# Altium PCB PCB1.PcbDoc
Units mil, origin at the board's own origin, x right, y up, seen from the top; angles counter-clockwise.
Board outline 2240.03 x 2530.03 mil, 2 copper layers (Top Layer, Bottom Layer); 11 components, 12 nets, 78 pads, 0 vias.
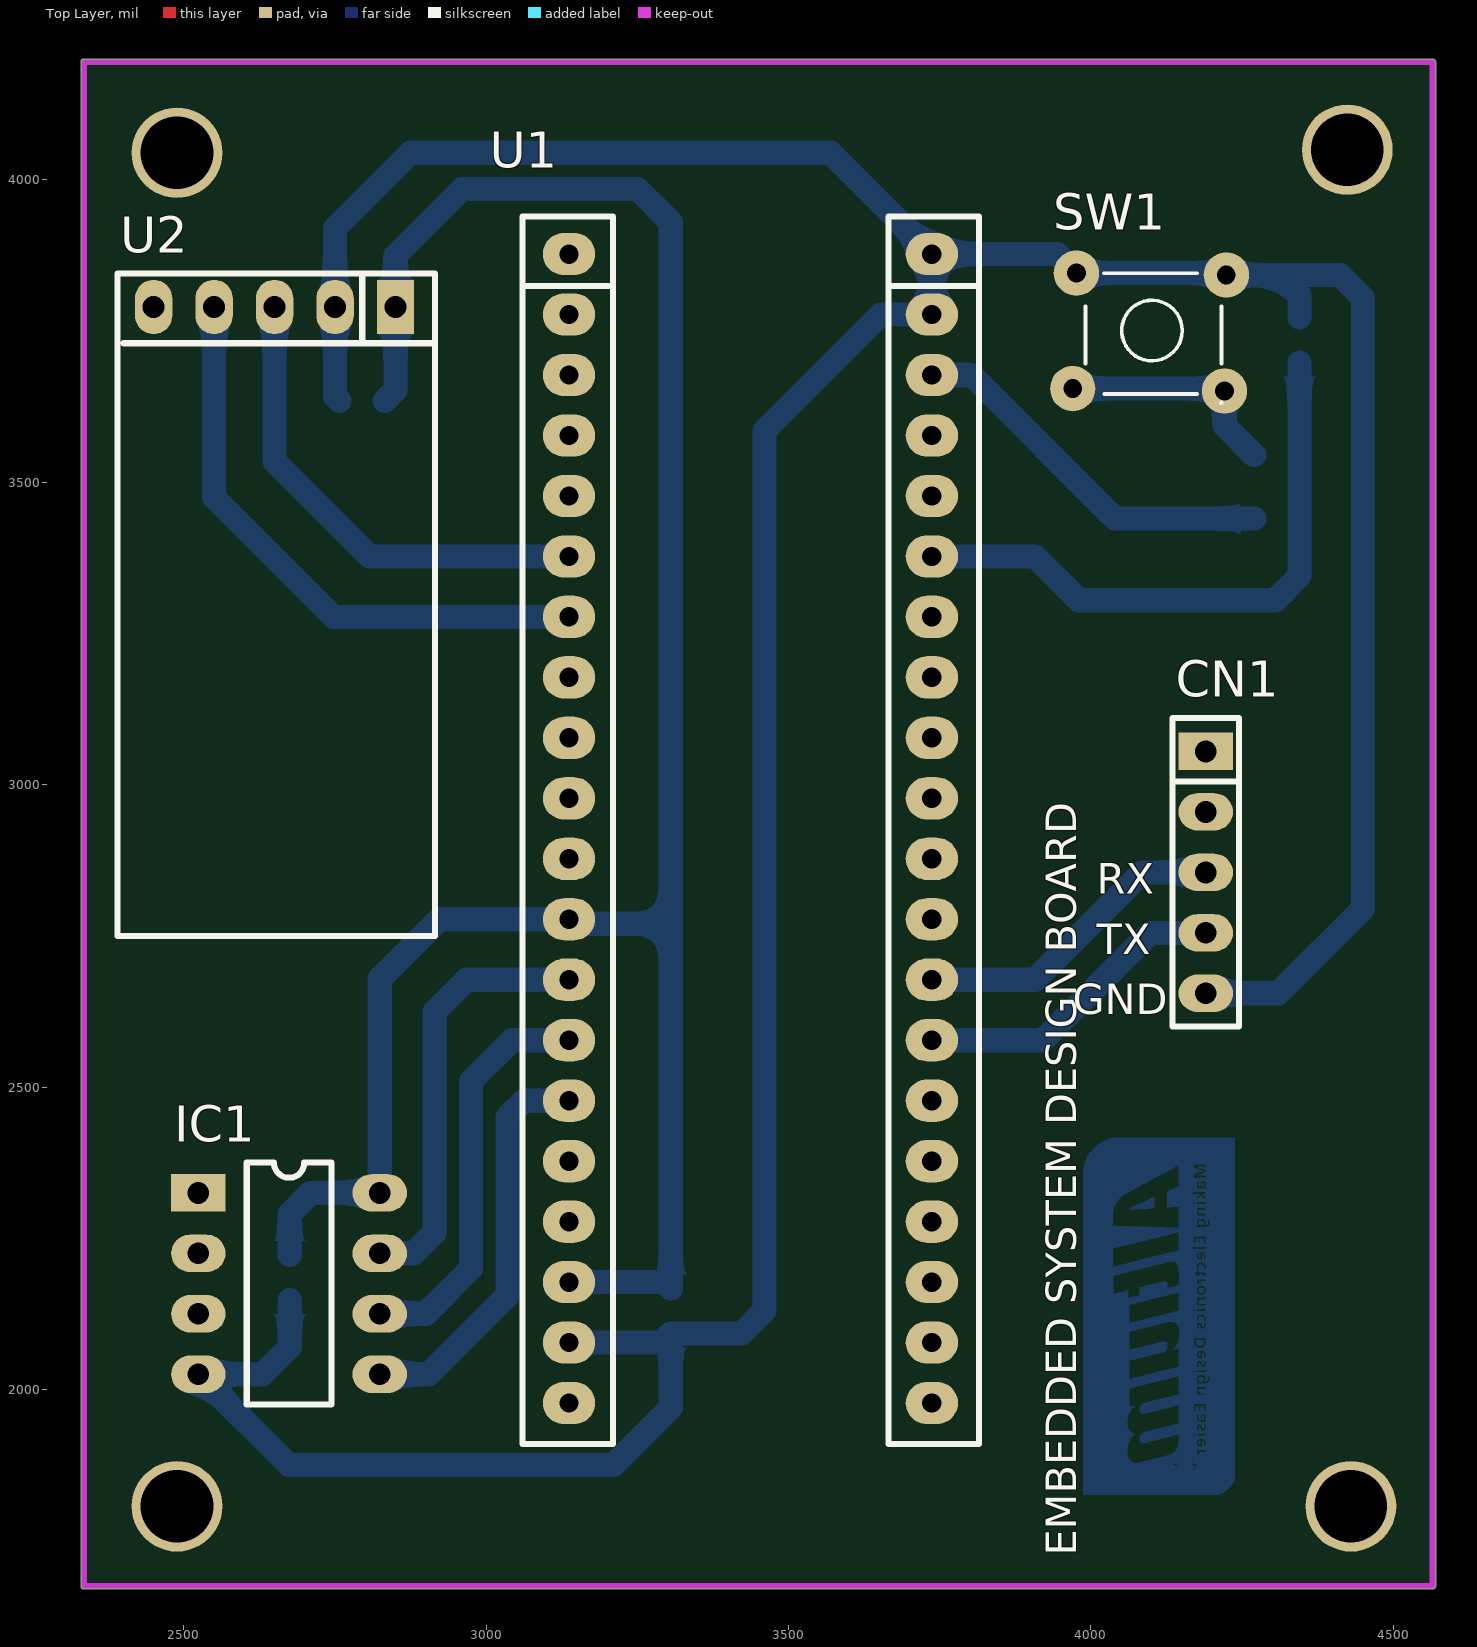
[diagram p0: Top Layer view]
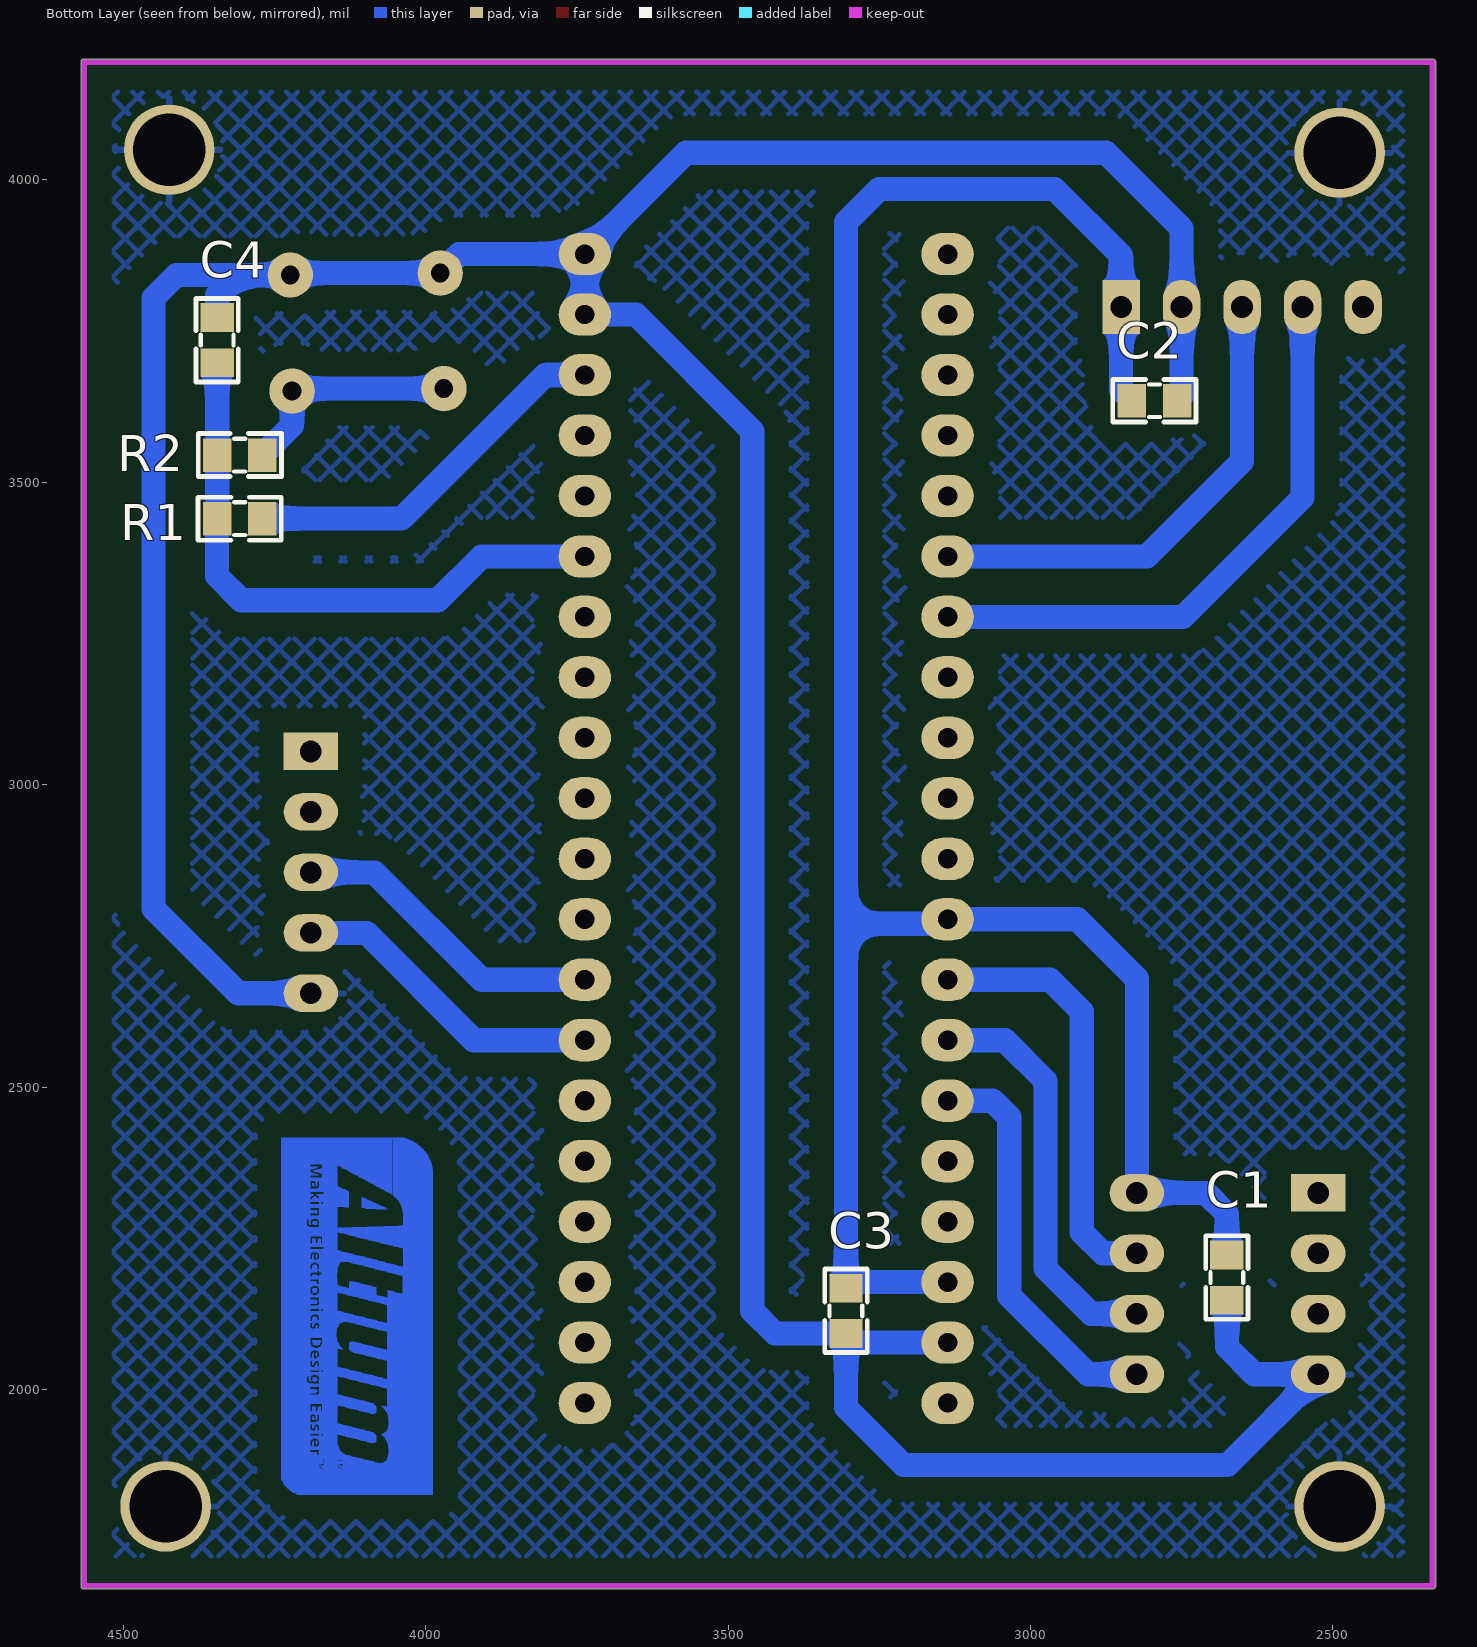
[diagram p1: Bottom Layer view, seen from below]
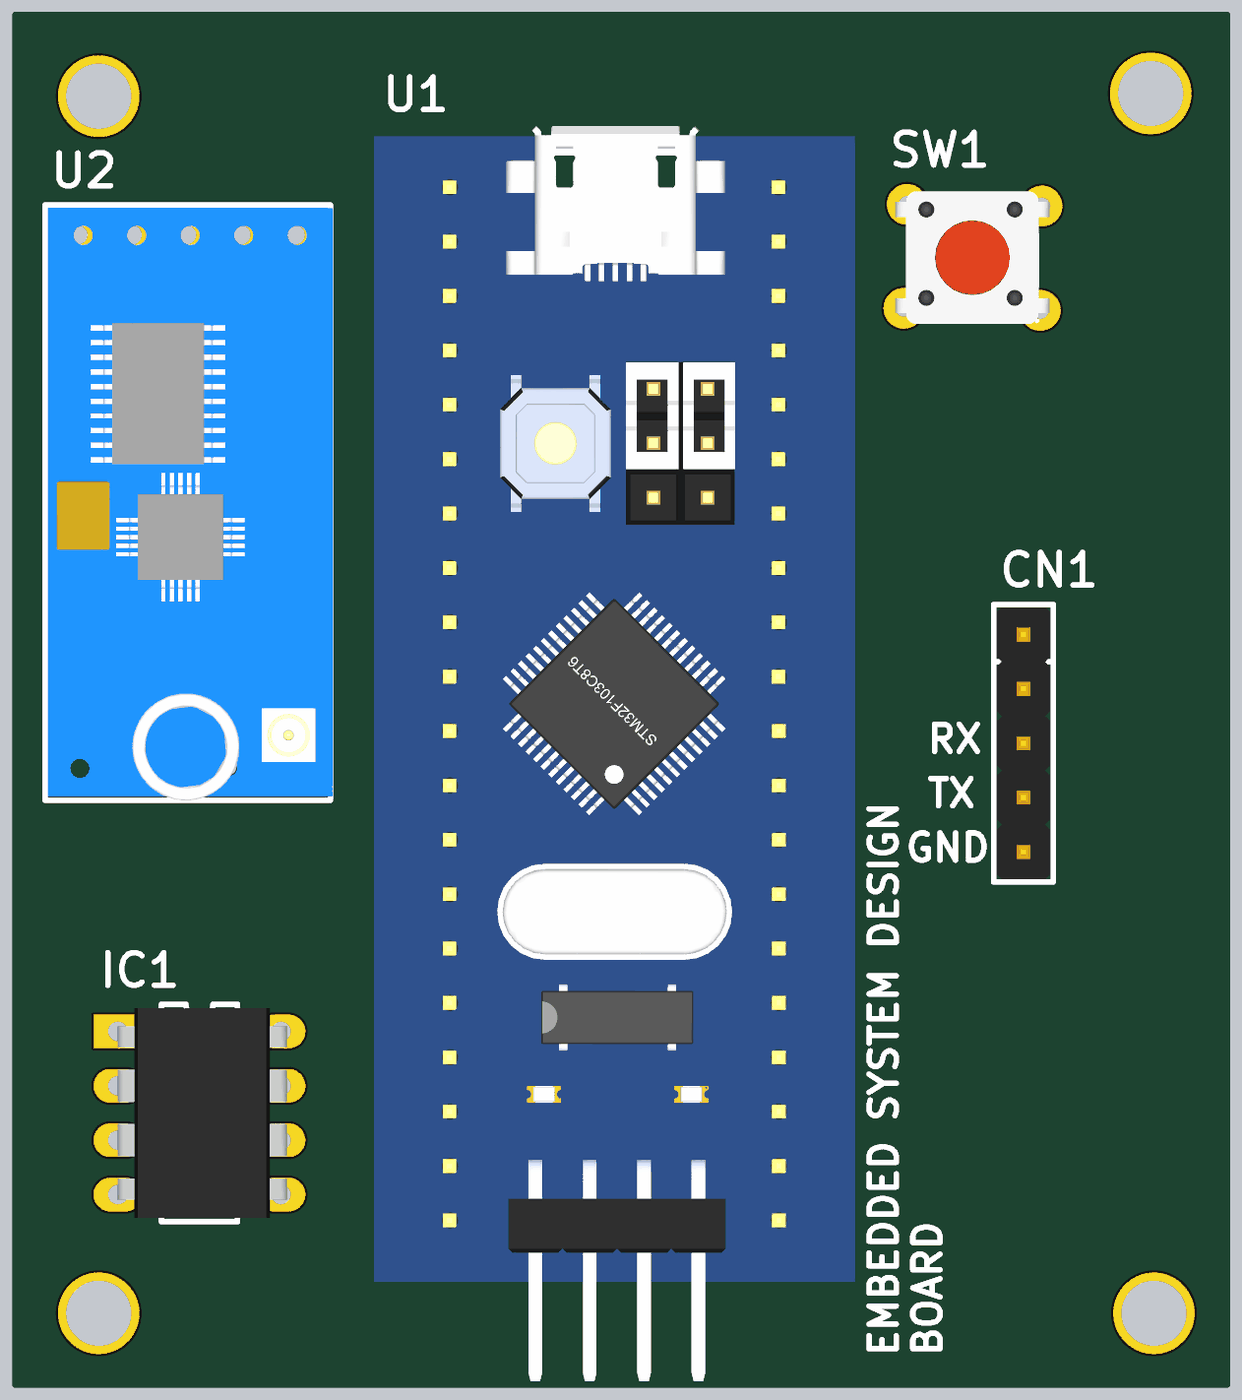
[diagram p2: 3D render of the assembled board from above, using the file's embedded part models]
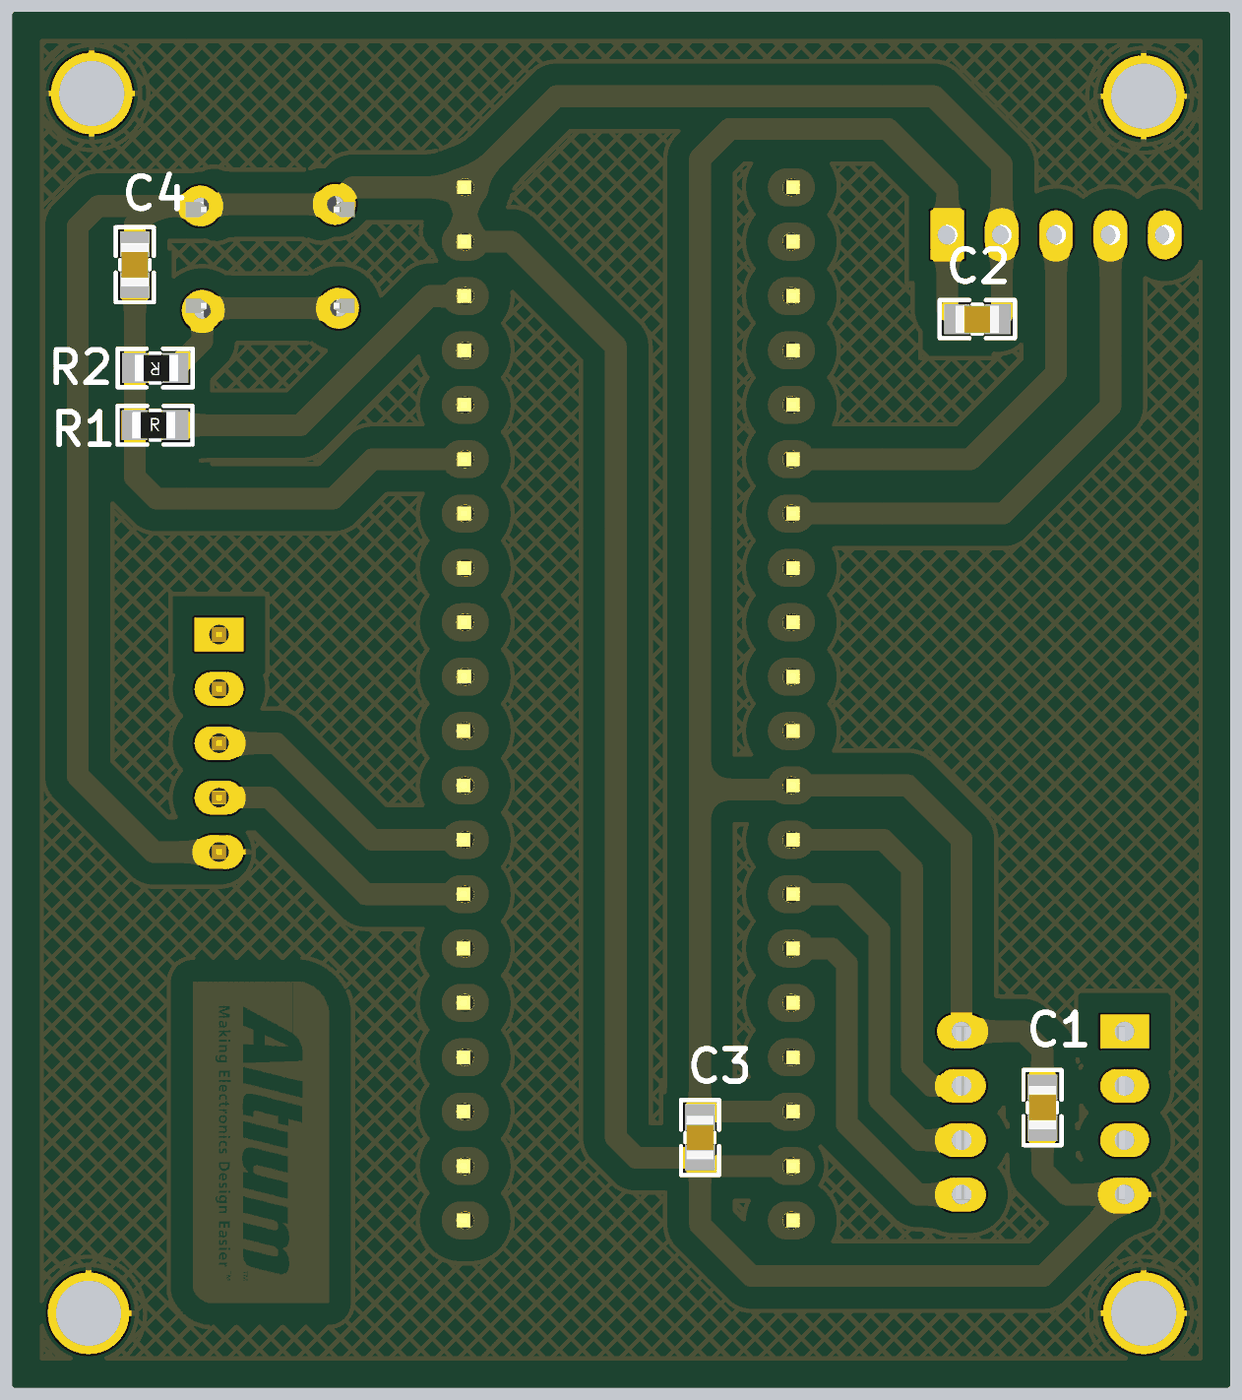
[diagram p3: 3D render of the assembled board from below, using the file's embedded part models]

## Layer stack, top to bottom
Top Solder: solder mask 0.4, Solder Resist, Dk 3.5
Top Layer: signal copper 1.4
Dielectric 1: dielectric 12.6, FR-4, Dk 4.8
Bottom Layer: signal copper 1.4
Bottom Solder: solder mask 0.4, Solder Resist, Dk 3.5

## Board outline
2329.99,1675 2329.98,4195 cw(c2335,4195) 2335,4200.02 4565,4200.02 cw(c4565,4195) 4570.02,4195 4570.02,1675 cw(c4565,1675) 4565,1669.98 2335,1669.98 cw(c2335,1675)

## Design rules (kind name [scope] priority, off if disabled: settings)
Clearance [All] p1: gap=40 ignorepadtopadclearanceinfootprint=FALSE
PolygonConnect [All] p1: connectstyle=Relief reliefconductorwidth=10 reliefentries=4 polygonreliefangle="90 Angle" airgapwidth=10
RoutingVias [All] p1: holewidth=28 width=50 viastyle="Through Hole" minholewidth=28 minwidth=50 maxholewidth=28 maxwidth=50
SolderMaskExpansion [All] p1: expansion=4
Width [All] p1: maxlimit=50 minlimit=30 preferedwidth=40
30 further rules are at their usual default settings.

## Components (designator, comment, footprint, x,y, rotation, side; value= is the part's Value field where it differs from the comment)
C1 "104" "tu 0805" 2675,2185 r270 bottom
C2 "104" "tu 0805" 2795,3635 r180 bottom
C3 "104" "tu 0805" 3305,2130 r270 bottom
C4 "104" "tu 0805" 4345,3735 r90 bottom
CN1 "Header 5p" "HEADER 5P MALE" 4190,3055 r0 top
IC1 "MH002775" DIP8 2524,2325 r0 top
R1 "10k" "tro smd 0805" 4307.77,3442.39 r180 bottom
R2 "1k" "tro smd 0805" 4307.43,3542.61 r0 bottom
SW1 "Nut Nhan 4 Chan" SW4 3976,3846 r0 top value="Nút Nh?n 4 Chân 6x6x9MM DIP"
U1 "Using STM32F103C8 MCU" "STM32 BluePill" 3141.99,3877.48 r0 top
U2 "HC 12" "HC 12" 2850,3790 r270 top

## Footprints (in the part's own frame and the unit in brackets; to place one, negate y for a bottom-side part, rotate by r counter-clockwise, add the part's x,y. Pads: shape width x height; smd on the part's side, far side on the other; paste and mask are expansions set on the pad)
DIP8 [mil]
  rect 90x62 hole 36: 1(0,0)
  oval 90x62 hole 36: 2(0,-100) 3(0,-200) 4(0,-300) 5(300,-300) 6(300,-200) 7(300,-100) 8(300,0)
  silkscreen extent 80,-350 220,50, body extent -1,-343 311,43, height 179
"HC 12" [mil]
  rect 90x62 hole 36: 1(0,0)
  oval 90x62 hole 36: 2(0,-100) 3(0,-200) 4(0,-300) 5(0,-400)
  silkscreen extent -55,-460 1040,65, body extent -50,-455 1040,69, height 1020
"HEADER 5P MALE" [mil]
  rect 90x62 hole 36: 1(0,0)
  oval 90x62 hole 36: 2(0,-100) 3(0,-200) 4(0,-300) 5(0,-400)
  silkscreen extent -55,-455 55,55, body extent -50,-450 50,50, height 350
"STM32 BluePill" [mil]
  oval 86.61x70 hole 32: 1(-5,0) 2(-5,-100) 3(-5,-200) 4(-5,-300) 5(-5,-400) 6(-5,-500) 7(-5,-600) 8(-5,-700) 9(-5,-800) 10(-5,-900) 11(-5,-1000) 12(-5,-1100) 13(-5,-1200) 14(-5,-1300) 15(-5,-1400) 16(-5,-1500) 17(-5,-1600) 18(-5,-1700) 19(-5,-1800) 20(-5,-1900) 21(595,-1900) 22(595,-1800) 23(595,-1700) 24(595,-1600) 25(595,-1500) 26(595,-1400) 27(595,-1300) 28(595,-1200) 29(595,-1100) 30(595,-1000) 31(595,-900) 32(595,-800) 33(595,-700) 34(595,-600) 35(595,-500) 36(595,-400) 37(595,-300) 38(595,-200) 39(595,-100) 40(595,0)
  body extent -147,-2196 739,113, height 571
SW4 [mil] "SW button 4pin, 250 x250 mil"
  round 75 hole 31: 1(0,0) 2(245,-195) 3(248,-3) 4(-6,-191)
  silkscreen extent 15,-215 240,0, body extent -36,-220 276,24, height 276
"tro smd 0805" [mm]
  rect 1.2x1.4 smd: 1(-0.946,-0.061) 2(0.954,-0.061)
  silkscreen extent -1.75,-0.97 1.75,0.84, body extent -1.56,-0.76 1.44,0.64, height 0.53
"tu 0805" [mm] "Compoment SMD 80x50mil"
  rect 1.2x1.4 smd: 1(-0.946,-0.003) 2(0.954,-0.003)
  silkscreen extent -1.75,-0.89 1.75,0.89, body extent -1.01,-0.64 1.01,0.63, height 0.61

## Part data
C1 C2 C3 C4: library part "Tu 0805 104 50V 10%", "Dán", Chung_Loai=Dán, Don_Vi=Con, Ma_Hang=MH004551, So_Chan=2, Ten_Linh_Kien="T? 0805 104-100nF 10% 50V"
IC1: library part 24Cxx_MH, "Dán", Chung_Loai=Dán, Don_Vi=Con, Ma_Hang=MH002775, Ten_Linh_Kien="AT24C01 DIP8 EEPROM 1KBIT"
R1: library part "Tro 0805 1% 10k", "Dán", Chung_Loai=Dán, Don_Vi=Con, Ma_Hang=MH005473, So_Chan=2, Ten_Linh_Kien="Tr? 0805 1% 10k"
R2: library part "Tro 0805 1% 3.3k", "Dán", Chung_Loai=Dán, Don_Vi=Con, Ma_Hang=MH005472, So_Chan=2, Ten_Linh_Kien="Tr? 0805 1% 3.3k"
SW1: "C?m", Don_Vi=Con, Ma_Hang=MH004077
U1: library part BluePill

## Free pads (board coordinates)
  round 150 hole 120: 2(2488.67,4045) 3(4424.13,4050) 4(4430,1806.68) 6(2488.67,1806.68)

## Nets (pads, with @x,y where several pads share a name; then routed paths per layer and width w, separated by ;. In a path a pad name is that pad's centre, name@x,y a point inside that pad or via, vN(x,y) a via of type N, cw(c..) or ccw(c..) an arc to the next point about the centre after c; other vN are vias at no path point)
3V3: R1.2 U1.38 | length 631.6
  Bottom Layer w40: U1.38 3802.52,3677.48 4040,3440 R1.2
+5: C1.1 C2.1 C3.1 IC1.8 U1.12 U1.18 U2.1 | length 3816.4
  Bottom Layer w40: C1.1 2675.13,2290.13 2710,2325 IC1.8 2824,2679 2922.48,2777.48 U1.12 3144.47,2770 3305.13,2770 ; C2.1 2850,3652.64 U2.1 2850,3875 2960,3985 3250.13,3985 3305.13,3930 3305.13,2770 ; U1.18 3294.89,2177.48 C3.1 3305.13,2770
BUT1: C4.1 R1.1 R2.2 U1.35 | length 1007.4
  Bottom Layer w40: U1.35 3907.52,3377.48 3980,3305 4305,3305 4345,3345 R1.1 4344.87,3440.13 C4.1
GND: C1.2 C2.2 C3.2 C4.2 CN1.5 IC1.4 pad.2 pad.3 pad.4 pad.6 SW1.1 SW1.3 U1.19 U1.39 U1.40 U2.2 | length 7060
  Bottom Layer w40: C1.2 2675.13,2070.13 2630,2025 IC1.4 2674,1875 3210,1875 3305.13,1970.13 C3.2 ; C2.2 2750,3642.29 U2.2 2750,3920 2875,4045 3569.47,4045 U1.40 ; U1.19 3290.18,2077.48 C3.2 ; CN1.5 4310,2655 4450,2795 4450,3805 4412,3843 4311.87,3843 ; C4.2 4344.87,3810 4311.87,3843 ; C3.2 3422.43,2092.43 3460,2130 3460,3585 3652.48,3777.48 U1.39 U1.40 ; U1.40 3944.52,3877.48 SW1.1 4221,3846 SW1.3 4311.87,3843
NetR2_1: R2.1 SW1.2 SW1.4 | length 379
  Bottom Layer w40: SW1.4 4217,3655 SW1.2 4221,3594.2 R2.1
RX: U1.7 U2.4 | length 983.8
  Bottom Layer w40: U2.4 2550,3475 2747.52,3277.48 U1.7
RX2: CN1.3 U1.28 | length 526.5
  Bottom Layer w40: U1.28 3907.48,2677.48 4085,2855 CN1.3
SCL: IC1.6 U1.14 | length 682
  Bottom Layer w40: IC1.6 2900,2125 2975,2200 2975,2510 3042.48,2577.48 U1.14
SDA: IC1.5 U1.15 | length 673.2
  Bottom Layer w40: IC1.5 2905,2025 3035,2155 3035,2450 3062.48,2477.48 U1.15
TX: U1.6 U2.3 | length 807.2
  Bottom Layer w40: U2.3 2650,3535 2807.52,3377.48 U1.6
TX2: CN1.4 U1.27 | length 526.5
  Bottom Layer w40: U1.27 3920.61,2577.48 4098.14,2755 CN1.4
WP: IC1.7 U1.13 | length 714.2
  Bottom Layer w40: IC1.7 2880,2225 2915,2260 2915,2625 2967.48,2677.48 U1.13
pads on no net: CN1.1 CN1.2 IC1.1 IC1.2 IC1.3 U1.1 U1.2 U1.3 U1.4 U1.5 U1.8 U1.9 U1.10 U1.11 U1.16 U1.17 U1.20 U1.21 U1.22 U1.23 U1.24 U1.25 U1.26 U1.29 U1.30 U1.31 U1.32 U1.33 U1.34 U1.36 U1.37 U2.5
copper on no net: | length 113193
  Bottom Layer w1: 3988,1826 3988,2363 ; 3989,1826 3989,2369 ; 3990,1826 3990,2372 ; 3991,1826 3991,2375 ; 3992,1826 3992,2378 ; 3993,1826 3993,2380 ; 3994,1826 3994,2382 ; 3995,1826 3995,2384 ; 3996,1826 3996,2386 ; 3997,1826 3997,2388 ; 3998,1826 3998,2389 ; 3999,1826 3999,2391 ; 4000,1826 4000,2392 ; 4001,1826 4001,2393 ; 4002,1826 4002,2394 ; 4003,1826 4003,2396 ; 4004,1826 4004,2397 ; 4005,1826 4005,2398 ; 4006,1826 4006,2399 ; 4007,1826 4007,2400 ; 4008,1826 4008,2401 ; 4009,1826 4009,2401 ; 4010,1826 4010,2402 ; 4011,1826 4011,2403 ; 4012,1826 4012,2404 ; 4013,1826 4013,2405 ; 4014,1826 4014,2405 ; 4015,1826 4015,2406 ; 4016,1826 4016,2407 ; 4017,1826 4017,2408 ; 4018,1826 4018,2408 ; 4019,1826 4019,2409 ; 4020,1826 4020,2409 ; 4021,1826 4021,2410 ; 4022,1826 4022,2411 ; 4023,1826 4023,2411 ; 4024,1826 4024,2411 ; 4025,1826 4025,2412 ; 4026,1826 4026,2412 ; 4027,1826 4027,2413 ; 4028,1826 4028,2413 ; 4029,1826 4029,2414 ; 4030,1826 4030,2414 ; 4031,1826 4031,2414 ; 4032,1826 4032,2415 ; 4033,1826 4033,2415 ; 4034,1826 4034,2415 ; 4035,1826 4035,2415 ; 4036,1826 4036,2416 ; 4037,1826 4037,2202 ; 4037,2233 4037,2271 ; 4037,2292 4037,2416 ; 4038,1826 4038,2157 ; 4038,2188 4038,2203 ; 4038,2234 4038,2271 ; 4038,2298 4038,2416 ; 4039,1826 4039,2158 ; 4039,2188 4039,2203 ; 4039,2234 4039,2271 ; 4039,2301 4039,2416 ; 4040,1826 4040,2158 ; 4040,2189 4040,2203 ; 4040,2234 4040,2271 ; 4040,2304 4040,2416 ; 4041,1826 4041,2158 ; 4041,2189 4041,2203 ; 4041,2234 4041,2271 ; 4041,2306 4041,2416 ; 4042,1826 4042,2158 ; 4042,2189 4042,2204 ; 4042,2235 4042,2271 ; 4042,2308 4042,2416 ; 4043,1826 4043,2159 ; 4043,2189 4043,2204 ; 4043,2235 4043,2271 ; 4043,2310 4043,2416 ; 4044,1826 4044,2159 ; 4044,2190 4044,2204 ; 4044,2235 4044,2270 ; 4044,2311 4044,2416 ; 4045,1826 4045,2159 ; 4045,2190 4045,2204 ; 4045,2235 4045,2270 ; 4045,2313 4045,2416 ; 4046,1826 4046,2159 ; 4046,2190 4046,2205 ; 4046,2236 4046,2270 ; 4046,2314 4046,2416 ; 4047,1826 4047,2160 ; 4047,2190 4047,2205 ; 4047,2236 4047,2270 ; 4047,2315 4047,2416 ; 4048,1826 4048,2160 ; 4048,2191 4048,2205 ; 4048,2236 4048,2270 ; 4048,2316 4048,2416 ; 4049,1826 4049,2160 ; 4049,2191 4049,2205 ; 4049,2236 4049,2270 ; 4049,2317 4049,2416 ; 4050,1826 4050,2160 ; 4050,2191 4050,2206 ; 4050,2237 4050,2270 ; 4050,2318 4050,2416 ; 4051,1826 4051,2161 ; 4051,2191 4051,2206 ; 4051,2237 4051,2270 ; 4051,2319 4051,2416 ; 4052,1826 4052,2161 ; 4052,2192 4052,2206 ; 4052,2237 4052,2270 ; 4052,2320 4052,2416 ; 4053,1826 4053,2161 ; 4053,2192 4053,2206 ; 4053,2237 4053,2270 ; 4053,2321 4053,2416 ; 4054,1826 4054,2162 ; 4054,2192 4054,2207 ; 4054,2238 4054,2270 ; 4054,2322 4054,2416 ; 4055,1826 4055,2162 ; 4055,2192 4055,2207 ; 4055,2238 4055,2270 ; 4055,2414 4055,2416 ; 4056,1826 4056,2162 ; 4056,2193 4056,2207 ; 4056,2238 4056,2270 ; 4056,2323 4056,2416 ; 4057,1826 4057,2162 ; 4057,2193 4057,2207 ; 4057,2238 4057,2270 ; 4057,2324 4057,2416 ; 4058,1826 4058,2163 ; 4058,2193 4058,2208 ; 4058,2238 4058,2270 ; 4058,2324 4058,2416 ; 4059,1826 4059,2163 ; 4059,2193 4059,2208 ; 4059,2239 4059,2270 ; 4059,2325 4059,2416 ; 4060,1826 4060,2163 ; 4060,2194 4060,2208 ; 4060,2239 4060,2270 ; 4060,2325 4060,2416 ; 4061,1826 4061,1893 ; 4061,1903 4061,1940 ; 4061,1951 4061,2163 ; 4061,2194 4061,2208 ; 4061,2239 4061,2270 ; 4061,2326 4061,2416 ; 4062,1826 4062,1888 ; 4062,1909 4062,1936 ; 4062,1957 4062,2164 ; 4062,2194 4062,2209 ; 4062,2239 4062,2270 ; 4062,2326 4062,2416 ; 4063,1826 4063,1886 ; 4063,1912 4063,1933 ; 4063,1960 4063,2151 ; 4063,2194 4063,2209 ; 4063,2240 4063,2270 ; 4063,2327 4063,2416 ; 4064,1826 4064,1884 ; 4064,1914 4064,1932 ; 4064,1962 4064,1971 ; 4064,2002 4064,2017 ; 4064,2048 4064,2065 ; 4064,2096 4064,2109 ; 4064,2140 4064,2151 ; 4064,2195 4064,2209 ; 4064,2240 4064,2270 ; 4064,2298 4064,2299 ; 4064,2327 4064,2416 ; 4065,1826 4065,1882 ; 4065,1916 4065,1930 ; 4065,1964 4065,1971 ; 4065,2002 4065,2017 ; 4065,2048 4065,2065 ; 4065,2096 4065,2110 ; 4065,2140 4065,2152 ; 4065,2195 4065,2209 ; 4065,2240 4065,2270 ; 4065,2298 4065,2299 ; 4065,2328 4065,2416 ; 4066,1826 4066,1881 ; 4066,1918 4066,1929 ; 4066,1965 4066,1971 ; 4066,2002 4066,2017 ; 4066,2048 4066,2065 ; 4066,2096 4066,2110 ; 4066,2141 4066,2152 ; 4066,2195 4066,2210 ; 4066,2240 4066,2270 ; 4066,2298 4066,2300 ; 4066,2328 4066,2416 ; 4067,1826 4067,1880 ; 4067,1920 4067,1929 ; 4067,1967 4067,1972 ; 4067,2003 4067,2018 ; 4067,2048 4067,2066 ; 4067,2096 4067,2110 ; 4067,2141 4067,2152 ; 4067,2195 4067,2210 ; 4067,2241 4067,2270 ; 4067,2298 4067,2300 ; 4067,2329 4067,2416 ; 4068,1826 4068,1880 ; 4068,1921 4068,1928 ; 4068,1968 4068,1972 ; 4068,2003 4068,2018 ; 4068,2049 4068,2066 ; 4068,2097 4068,2110 ; 4068,2141 4068,2152 ; 4068,2196 4068,2210 ; 4068,2241 4068,2270 ; 4068,2298 4068,2301 ; 4068,2329 4068,2416 ; 4069,1826 4069,1879 ; 4069,1922 4069,1927 ; 4069,1969 4069,1972 ; 4069,2003 4069,2018 ; 4069,2049 4069,2066 ; 4069,2097 4069,2111 ; 4069,2141 4069,2153 ; 4069,2196 4069,2211 ; 4069,2241 4069,2270 ; 4069,2298 4069,2301 ; 4069,2330 4069,2416 ; 4070,1826 4070,1879 ; 4070,1923 4070,1927 ; 4070,1970 4070,1972 ; 4070,2003 4070,2018 ; 4070,2049 4070,2066 ; 4070,2097 4070,2111 ; 4070,2142 4070,2153 ; 4070,2196 4070,2211 ; 4070,2241 4070,2269 ; 4070,2298 4070,2302 ; 4070,2331 4070,2416 ; 4071,1826 4071,1879 ; 4071,1924 4071,1927 ; 4071,1971 4071,1973 ; 4071,2004 4071,2019 ; 4071,2049 4071,2067 ; 4071,2097 4071,2111 ; 4071,2142 4071,2153 ; 4071,2196 4071,2211 ; 4071,2242 4071,2269 ; 4071,2298 4071,2302 ; 4071,2331 4071,2416 ; 4072,1826 4072,1879 ; 4072,1925 4072,1926 ; 4072,1972 4072,1973 ; 4072,2004 4072,2019 ; 4072,2050 4072,2067 ; 4072,2098 4072,2111 ; 4072,2142 4072,2153 ; 4072,2197 4072,2211 ; 4072,2242 4072,2269 ; 4072,2298 4072,2303 ; 4072,2332 4072,2416 ; 4073,1826 4073,1878 ; 4073,2004 4073,2019 ; 4073,2050 4073,2067 ; 4073,2098 4073,2112 ; 4073,2142 4073,2154 ; 4073,2197 4073,2212 ; 4073,2242 4073,2269 ; 4073,2298 4073,2303 ; 4073,2332 4073,2416 ; 4074,1826 4074,1878 ; 4074,2004 4074,2019 ; 4074,2050 4074,2067 ; 4074,2098 4074,2112 ; 4074,2143 4074,2154 ; 4074,2197 4074,2212 ; 4074,2242 4074,2269 ; 4074,2298 4074,2304 ; 4074,2333 4074,2416 ; 4075,1826 4075,1878 ; 4075,2005 4075,2020 ; 4075,2050 4075,2068 ; 4075,2098 4075,2112 ; 4075,2143 4075,2154 ; 4075,2197 4075,2212 ; 4075,2243 4075,2269 ; 4075,2298 4075,2304 ; 4075,2333 4075,2416 ; 4076,1826 4076,1878 ; 4076,2005 4076,2020 ; 4076,2051 4076,2068 ; 4076,2099 4076,2112 ; 4076,2143 4076,2154 ; 4076,2198 4076,2212 ; 4076,2243 4076,2269 ; 4076,2298 4076,2304 ; 4076,2334 4076,2416 ; 4077,1826 4077,1878 ; 4077,2005 4077,2020 ; 4077,2051 4077,2068 ; 4077,2099 4077,2113 ; 4077,2143 4077,2155 ; 4077,2198 4077,2213 ; 4077,2243 4077,2269 ; 4077,2298 4077,2305 ; 4077,2334 4077,2416 ; 4078,1826 4078,1878 ; 4078,2005 4078,2020 ; 4078,2051 4078,2068 ; 4078,2099 4078,2113 ; 4078,2144 4078,2155 ; 4078,2198 4078,2213 ; 4078,2243 4078,2269 ; 4078,2298 4078,2305 ; 4078,2335 4078,2416 ; 4079,1826 4079,1879 ; 4079,2006 4079,2021 ; 4079,2051 4079,2069 ; 4079,2099 4079,2113 ; 4079,2144 4079,2155 ; 4079,2198 4079,2213 ; 4079,2244 4079,2269 ; 4079,2298 4079,2306 ; 4079,2335 4079,2416 ; 4080,1826 4080,1879 ; 4080,2006 4080,2021 ; 4080,2052 4080,2069 ; 4080,2100 4080,2113 ; 4080,2144 4080,2155 ; 4080,2199 4080,2213 ; 4080,2244 4080,2269 ; 4080,2298 4080,2306 ; 4080,2336 4080,2416 ; 4081,1826 4081,1879 ; 4081,2006 4081,2021 ; 4081,2052 4081,2069 ; 4081,2100 4081,2114 ; 4081,2144 4081,2156 ; 4081,2199 4081,2214 ; 4081,2244 4081,2269 ; 4081,2299 4081,2307 ; 4081,2336 4081,2416 ; 4082,1826 4082,1879 ; 4082,1914 4082,1923 ; 4082,1962 4082,1971 ; 4082,2006 4082,2021 ; 4082,2052 4082,2069 ; 4082,2100 4082,2114 ; 4082,2145 4082,2169 ; 4082,2199 4082,2214 ; 4082,2244 4082,2269 ; 4082,2299 4082,2307 ; 4082,2337 4082,2416 ; 4083,1826 4083,1879 ; 4083,1913 4083,1925 ; 4083,1961 4083,1973 ; 4083,2007 4083,2022 ; 4083,2052 4083,2070 ; 4083,2100 4083,2114 ; 4083,2145 4083,2169 ; 4083,2199 4083,2214 ; 4083,2245 4083,2269 ; 4083,2299 4083,2308 ; 4083,2338 4083,2416 ; 4084,1826 4084,1880 ; 4084,1912 4084,1926 ; 4084,1960 4084,1974 ; 4084,2007 4084,2022 ; 4084,2053 4084,2070 ; 4084,2101 4084,2114 ; 4084,2145 4084,2169 ; 4084,2200 4084,2214 ; 4084,2245 4084,2269 ; 4084,2299 4084,2308 ; 4084,2338 4084,2416 ; 4085,1826 4085,1880 ; 4085,1912 4085,1927 ; 4085,1960 4085,1975 ; 4085,2007 4085,2022 ; 4085,2053 4085,2070 ; 4085,2101 4085,2115 ; 4085,2145 4085,2169 ; 4085,2200 4085,2215 ; 4085,2245 4085,2269 ; 4085,2299 4085,2309 ; 4085,2339 4085,2416 ; 4086,1826 4086,1880 ; 4086,1912 4086,1928 ; 4086,1960 4086,1976 ; 4086,2007 4086,2022 ; 4086,2053 4086,2070 ; 4086,2101 4086,2115 ; 4086,2146 4086,2170 ; 4086,2200 4086,2215 ; 4086,2245 4086,2269 ; 4086,2299 4086,2309 ; 4086,2339 4086,2416 ; 4087,1826 4087,1880 ; 4087,1911 4087,1928 ; 4087,1960 4087,1976 ; 4087,2008 4087,2023 ; 4087,2053 4087,2071 ; 4087,2101 4087,2115 ; 4087,2146 4087,2170 ; 4087,2200 4087,2215 ; 4087,2246 4087,2269 ; 4087,2299 4087,2309 ; 4087,2340 4087,2416 ; 4088,1826 4088,1881 ; 4088,1912 4088,1929 ; 4088,1960 4088,1977 ; 4088,2008 4088,2023 ; 4088,2054 4088,2071 ; 4088,2102 4088,2115 ; 4088,2146 4088,2170 ; 4088,2201 4088,2215 ; 4088,2246 4088,2269 ; 4088,2299 4088,2310 ; 4088,2340 4088,2416 ; 4089,1826 4089,1881 ; 4089,1912 4089,1929 ; 4089,1960 4089,1977 ; 4089,2008 4089,2023 ; 4089,2054 4089,2071 ; 4089,2102 4089,2116 ; 4089,2146 4089,2170 ; 4089,2201 4089,2216 ; 4089,2246 4089,2269 ; 4089,2299 4089,2310 ; 4089,2341 4089,2416 ; 4090,1826 4090,1881 ; 4090,1912 4090,1929 ; 4090,1960 4090,1978 ; 4090,2008 4090,2023 ; 4090,2054 4090,2071 ; 4090,2102 4090,2116 ; 4090,2147 4090,2171 ; 4090,2201 4090,2216 ; 4090,2246 4090,2269 ; 4090,2299 4090,2311 ; 4090,2341 4090,2416 ; 4091,1826 4091,1881 ; 4091,1912 4091,1930 ; 4091,1960 4091,1978 ; 4091,2009 4091,2024 ; 4091,2054 4091,2072 ; 4091,2102 4091,2116 ; 4091,2147 4091,2171 ; 4091,2201 4091,2216 ; 4091,2247 4091,2269 ; 4091,2299 4091,2311 ; 4091,2342 4091,2416 ; 4092,1826 4092,1882 ; 4092,1912 4092,1930 ; 4092,1961 4092,1978 ; 4092,2009 4092,2024 ; 4092,2055 4092,2072 ; 4092,2103 4092,2116 ; 4092,2147 4092,2171 ; 4092,2202 4092,2216 ; 4092,2247 4092,2269 ; 4092,2299 4092,2312 ; 4092,2342 4092,2416 ; 4093,1826 4093,1882 ; 4093,1913 4093,1930 ; 4093,1961 4093,1978 ; 4093,2009 4093,2024 ; 4093,2055 4093,2072 ; 4093,2103 4093,2117 ; 4093,2147 4093,2171 ; 4093,2202 4093,2217 ; 4093,2247 4093,2269 ; 4093,2299 4093,2312 ; 4093,2343 4093,2416 ; 4094,1826 4094,1882 ; 4094,1913 4094,1931 ; 4094,1961 4094,1979 ; 4094,2009 4094,2024 ; 4094,2055 4094,2072 ; 4094,2103 4094,2117 ; 4094,2148 4094,2172 ; 4094,2202 4094,2217 ; 4094,2247 4094,2269 ; 4094,2299 4094,2313 ; 4094,2343 4094,2416 ; 4095,1826 4095,1882 ; 4095,1913 4095,1931 ; 4095,1961 4095,1979 ; 4095,2010 4095,2025 ; 4095,2055 4095,2073 ; 4095,2103 4095,2117 ; 4095,2148 4095,2172 ; 4095,2203 4095,2217 ; 4095,2248 4095,2269 ; 4095,2299 4095,2313 ; 4095,2344 4095,2416 ; 4096,1826 4096,1883 ; 4096,1913 4096,1931 ; 4096,1962 4096,1979 ; 4096,2010 4096,2025 ; 4096,2056 4096,2073 ; 4096,2104 4096,2117 ; 4096,2148 4096,2172 ; 4096,2203 4096,2217 ; 4096,2248 4096,2269 ; 4096,2299 4096,2314 ; 4096,2344 4096,2416 ; 4097,1826 4097,1883 ; 4097,1914 4097,1931 ; 4097,1962 4097,1979 ; 4097,2010 4097,2025 ; 4097,2056 4097,2073 ; 4097,2104 4097,2118 ; 4097,2148 4097,2172 ; 4097,2203 4097,2218 ; 4097,2248 4097,2268 ; 4097,2299 4097,2314 ; 4097,2345 4097,2416 ; 4098,1826 4098,1883 ; 4098,1914 4098,1932 ; 4098,1962 4098,1980 ; 4098,2010 4098,2025 ; 4098,2056 4098,2073 ; 4098,2104 4098,2118 ; 4098,2149 4098,2173 ; 4098,2203 4098,2218 ; 4098,2248 4098,2268 ; 4098,2299 4098,2315 ; 4098,2346 4098,2416 ; 4099,1826 4099,1883 ; 4099,1914 4099,1932 ; 4099,1962 4099,1980 ; 4099,2011 4099,2026 ; 4099,2056 4099,2074 ; 4099,2104 4099,2118 ; 4099,2149 4099,2173 ; 4099,2204 4099,2218 ; 4099,2249 4099,2268 ; 4099,2300 4099,2315 ; 4099,2346 4099,2416 ; 4100,1826 4100,1884 ; 4100,1914 4100,1932 ; 4100,1963 4100,1980 ; 4100,2011 4100,2026 ; 4100,2057 4100,2074 ; 4100,2105 4100,2118 ; 4100,2149 4100,2173 ; 4100,2204 4100,2218 ; 4100,2249 4100,2268 ; 4100,2300 4100,2315 ; 4100,2347 4100,2416 ; 4101,1826 4101,1884 ; 4101,1915 4101,1932 ; 4101,1963 4101,1980 ; 4101,2011 4101,2026 ; 4101,2057 4101,2074 ; 4101,2105 4101,2119 ; 4101,2149 4101,2173 ; 4101,2204 4101,2219 ; 4101,2249 4101,2268 ; 4101,2300 4101,2316 ; 4101,2347 4101,2416 ; 4102,1826 4102,1884 ; 4102,1915 4102,1933 ; 4102,1963 4102,1981 ; 4102,2011 4102,2026 ; 4102,2057 4102,2074 ; 4102,2105 4102,2119 ; 4102,2150 4102,2174 ; 4102,2204 4102,2219 ; 4102,2249 4102,2268 ; 4102,2300 4102,2316 ; 4102,2348 4102,2416 ; 4103,1826 4103,1884 ; 4103,1915 4103,1933 ; 4103,1963 4103,1981 ; 4103,2012 4103,2027 ; 4103,2057 4103,2075 ; 4103,2105 4103,2119 ; 4103,2150 4103,2174 ; 4103,2205 4103,2219 ; 4103,2250 4103,2268 ; 4103,2300 4103,2317 ; 4103,2348 4103,2416 ; 4104,1826 4104,1885 ; 4104,1915 4104,1933 ; 4104,1964 4104,1981 ; 4104,2012 4104,2027 ; 4104,2058 4104,2075 ; 4104,2106 4104,2119 ; 4104,2150 4104,2174 ; 4104,2205 4104,2219 ; 4104,2250 4104,2268 ; 4104,2300 4104,2317 ; 4104,2349 4104,2416 ; 4105,1826 4105,1885 ; 4105,1916 4105,1933 ; 4105,1964 4105,1981 ; 4105,2012 4105,2027 ; 4105,2058 4105,2075 ; 4105,2106 4105,2120 ; 4105,2150 4105,2174 ; 4105,2205 4105,2220 ; 4105,2250 4105,2268 ; 4105,2300 4105,2318 ; 4105,2349 4105,2416 ; 4106,1826 4106,1885 ; 4106,1916 4106,1934 ; 4106,1964 4106,1982 ; 4106,2012 4106,2027 ; 4106,2058 4106,2075 ; 4106,2106 4106,2120 ; 4106,2151 4106,2175 ; 4106,2205 4106,2220 ; 4106,2250 4106,2268 ; 4106,2350 4106,2416 ; 4107,1826 4107,1885 ; 4107,1916 4107,1934 ; 4107,1964 4107,1982 ; 4107,2013 4107,2028 ; 4107,2058 4107,2076 ; 4107,2106 4107,2120 ; 4107,2151 4107,2175 ; 4107,2206 4107,2220 ; 4107,2251 4107,2268 ; 4107,2350 4107,2416 ; 4108,1826 4108,1886 ; 4108,1916 4108,1934 ; 4108,1965 4108,1982 ; 4108,2013 4108,2028 ; 4108,2059 4108,2076 ; 4108,2107 4108,2120 ; 4108,2151 4108,2175 ; 4108,2206 4108,2220 ; 4108,2251 4108,2268 ; 4108,2351 4108,2416 ; 4109,1826 4109,1886 ; 4109,1917 4109,1934 ; 4109,1965 4109,1982 ; 4109,2013 4109,2028 ; 4109,2059 4109,2076 ; 4109,2107 4109,2121 ; 4109,2151 4109,2175 ; 4109,2206 4109,2221 ; 4109,2251 4109,2268 ; 4109,2351 4109,2416 ; 4110,1826 4110,1886 ; 4110,1917 4110,1935 ; 4110,1965 4110,1983 ; 4110,2013 4110,2028 ; 4110,2059 4110,2076 ; 4110,2107 4110,2121 ; 4110,2152 4110,2176 ; 4110,2206 4110,2221 ; 4110,2251 4110,2268 ; 4110,2352 4110,2416 ; 4111,1826 4111,1886 ; 4111,1917 4111,1935 ; 4111,1965 4111,1983 ; 4111,2014 4111,2029 ; 4111,2059 4111,2077 ; 4111,2107 4111,2121 ; 4111,2152 4111,2176 ; 4111,2207 4111,2221 ; 4111,2252 4111,2268 ; 4111,2353 4111,2416 ; 4112,1826 4112,1887 ; 4112,1917 4112,1935 ; 4112,1966 4112,1983 ; 4112,2014 4112,2029 ; 4112,2060 4112,2077 ; 4112,2108 4112,2121 ; 4112,2152 4112,2176 ; 4112,2207 4112,2221 ; 4112,2252 4112,2268 ; 4112,2353 4112,2416 ; 4113,1826 4113,1887 ; 4113,1918 4113,1935 ; 4113,1966 4113,1983 ; 4113,2014 4113,2029 ; 4113,2060 4113,2077 ; 4113,2108 4113,2122 ; 4113,2152 4113,2176 ; 4113,2207 4113,2222 ; 4113,2252 4113,2268 ; 4113,2354 4113,2416 ; 4114,1826 4114,1887 ; 4114,1918 4114,1936 ; 4114,1966 4114,1984 ; 4114,2014 4114,2029 ; 4114,2060 4114,2077 ; 4114,2108 4114,2122 ; 4114,2153 4114,2177 ; 4114,2207 4114,2222 ; 4114,2252 4114,2268 ; 4114,2354 4114,2416 ; 4115,1826 4115,1887 ; 4115,1918 4115,1936 ; 4115,1966 4115,1984 ; 4115,2015 4115,2030 ; 4115,2060 4115,2078 ; 4115,2108 4115,2122 ; 4115,2153 4115,2177 ; 4115,2208 4115,2222 ; 4115,2253 4115,2268 ; 4115,2355 4115,2416 ; 4116,1826 4116,1888 ; 4116,1918 4116,1936 ; 4116,1967 4116,1984 ; 4116,2015 4116,2030 ; 4116,2061 4116,2078 ; 4116,2109 4116,2122 ; 4116,2153 4116,2177 ; 4116,2208 4116,2222 ; 4116,2253 4116,2268 ; 4116,2355 4116,2416 ; 4117,1826 4117,1888 ; 4117,1919 4117,1936 ; 4117,1967 4117,1984 ; 4117,2015 4117,2030 ; 4117,2061 4117,2078 ; 4117,2109 4117,2123 ; 4117,2153 4117,2177 ; 4117,2208 4117,2223 ; 4117,2253 4117,2268 ; 4117,2356 4117,2416 ; 4118,1826 4118,1888 ; 4118,1919 4118,1937 ; 4118,1967 4118,1985 ; 4118,2015 4118,2030 ; 4118,2061 4118,2078 ; 4118,2109 4118,2123 ; 4118,2154 4118,2178 ; 4118,2208 4118,2223 ; 4118,2253 4118,2268 ; 4118,2356 4118,2416 ; 4119,1826 4119,1888 ; 4119,1919 4119,1937 ; 4119,1967 4119,1985 ; 4119,2016 4119,2031 ; 4119,2061 4119,2079 ; 4119,2109 4119,2123 ; 4119,2154 4119,2178 ; 4119,2209 4119,2223 ; 4119,2254 4119,2268 ; 4119,2357 4119,2416 ; 4120,1826 4120,1889 ; 4120,1919 4120,1937 ; 4120,1968 4120,1985 ; 4120,2016 4120,2031 ; 4120,2062 4120,2079 ; 4120,2110 4120,2123 ; 4120,2154 4120,2178 ; 4120,2209 4120,2223 ; 4120,2254 4120,2268 ; 4120,2357 4120,2416 ; 4121,1826 4121,1889 ; 4121,1920 4121,1937 ; 4121,1968 4121,1985 ; 4121,2016 4121,2031 ; 4121,2062 4121,2079 ; 4121,2110 4121,2124 ; 4121,2154 4121,2178 ; 4121,2209 4121,2224 ; 4121,2254 4121,2268 ; 4121,2358 4121,2416 ; 4122,1826 4122,1889 ; 4122,1920 4122,1938 ; 4122,1968 4122,1986 ; 4122,2016 4122,2031 ; 4122,2063 4122,2079 ; 4122,2110 4122,2124 ; 4122,2155 4122,2178 ; 4122,2209 4122,2224 ; 4122,2254 4122,2268 ; 4122,2358 4122,2416 ; 4123,1826 4123,1889 ; 4123,1920 4123,1938 ; 4123,1968 4123,1986 ; 4123,2017 4123,2032 ; 4123,2063 4123,2079 ; 4123,2110 4123,2124 ; 4123,2155 4123,2179 ; 4123,2210 4123,2224 ; 4123,2255 4123,2267 ; 4123,2359 4123,2416 ; 4124,1826 4124,1890 ; 4124,1920 4124,1938 ; 4124,1969 4124,1986 ; 4124,2017 4124,2032 ; 4124,2064 4124,2078 ; 4124,2111 4124,2124 ; 4124,2155 4124,2178 ; 4124,2210 4124,2224 ; 4124,2255 4124,2267 ; 4124,2359 4124,2416 ; 4125,1826 4125,1890 ; 4125,1921 4125,1938 ; 4125,1969 4125,1986 ; 4125,2017 4125,2032 ; 4125,2065 4125,2078 ; 4125,2111 4125,2125 ; 4125,2155 4125,2178 ; 4125,2210 4125,2225 ; 4125,2255 4125,2267 ; 4125,2360 4125,2416 ; 4126,1826 4126,1890 ; 4126,1921 4126,1939 ; 4126,1969 4126,1987 ; 4126,2017 4126,2032 ; 4126,2067 4126,2077 ; 4126,2111 4126,2125 ; 4126,2156 4126,2177 ; 4126,2210 4126,2225 ; 4126,2255 4126,2267 ; 4126,2361 4126,2416 ; 4127,1826 4127,1890 ; 4127,1921 4127,1939 ; 4127,1969 4127,1987 ; 4127,2018 4127,2033 ; 4127,2111 4127,2125 ; 4127,2156 4127,2167 ; 4127,2211 4127,2225 ; 4127,2256 4127,2267 ; 4127,2301 4127,2327 ; 4127,2361 4127,2416 ; 4128,1826 4128,1891 ; 4128,1921 4128,1939 ; 4128,1970 4128,1987 ; 4128,2018 4128,2033 ; 4128,2112 4128,2125 ; 4128,2156 4128,2167 ; 4128,2211 4128,2225 ; 4128,2256 4128,2267 ; 4128,2301 4128,2328 ; 4128,2362 4128,2416 ; 4129,1826 4129,1891 ; 4129,1922 4129,1939 ; 4129,1970 4129,1987 ; 4129,2018 4129,2033 ; 4129,2112 4129,2126 ; 4129,2156 4129,2168 ; 4129,2211 4129,2226 ; 4129,2256 4129,2267 ; 4129,2301 4129,2328 ; 4129,2362 4129,2416 ; 4130,1826 4130,1891 ; 4130,1922 4130,1940 ; 4130,1970 4130,1988 ; 4130,2018 4130,2033 ; 4130,2112 4130,2126 ; 4130,2157 4130,2168 ; 4130,2211 4130,2226 ; 4130,2256 4130,2267 ; 4130,2301 4130,2329 ; 4130,2363 4130,2416 ; 4131,1826 4131,1891 ; 4131,1922 4131,1940 ; 4131,1970 4131,1988 ; 4131,2019 4131,2034 ; 4131,2112 4131,2126 ; 4131,2157 4131,2168 ; 4131,2211 4131,2226 ; 4131,2257 4131,2267 ; 4131,2301 4131,2329 ; 4131,2363 4131,2416 ; 4132,1826 4132,1892 ; 4132,1922 4132,1940 ; 4132,1971 4132,1988 ; 4132,2019 4132,2034 ; 4132,2112 4132,2126 ; 4132,2157 4132,2168 ; 4132,2211 4132,2226 ; 4132,2257 4132,2267 ; 4132,2301 4132,2330 ; 4132,2364 4132,2416 ; 4133,1826 4133,1892 ; 4133,1923 4133,1940 ; 4133,1971 4133,1988 ; 4133,2019 4133,2034 ; 4133,2112 4133,2127 ; 4133,2157 4133,2169 ; 4133,2211 4133,2227 ; 4133,2257 4133,2267 ; 4133,2301 4133,2330 ; 4133,2364 4133,2416 ; 4134,1826 4134,1893 ; 4134,1923 4134,1941 ; 4134,1971 4134,1989 ; 4134,2019 4134,2034 ; 4134,2112 4134,2127 ; 4134,2158 4134,2169 ; 4134,2211 4134,2227 ; 4134,2257 4134,2267 ; 4134,2301 4134,2331 ; 4134,2365 4134,2416 ; 4135,1826 4135,1893 ; 4135,1923 4135,1941 ; 4135,1971 4135,1989 ; 4135,2020 4135,2035 ; 4135,2112 4135,2127 ; 4135,2158 4135,2169 ; 4135,2211 4135,2227 ; 4135,2258 4135,2267 ; 4135,2301 4135,2331 ; 4135,2365 4135,2416 ; 4136,1826 4136,1894 ; 4136,1923 4136,1941 ; 4136,1972 4136,1989 ; 4136,2020 4136,2035 ; 4136,2112 4136,2127 ; 4136,2158 4136,2169 ; 4136,2211 4136,2227 ; 4136,2258 4136,2267 ; 4136,2302 4136,2331 ; 4136,2366 4136,2416 ; 4137,1826 4137,1867 ; 4137,1869 4137,1874 ; 4137,1877 4137,1878 ; 4137,1885 4137,1895 ; 4137,1924 4137,1941 ; 4137,1972 4137,1989 ; 4137,2020 4137,2035 ; 4137,2066 4137,2067 ; 4137,2111 4137,2128 ; 4137,2158 4137,2170 ; 4137,2211 4137,2228 ; 4137,2258 4137,2267 ; 4137,2302 4137,2332 ; 4137,2366 4137,2416 ; 4138,1826 4138,1867 ; 4138,1870 4138,1874 ; 4138,1877 4138,1881 ; 4138,1883 4138,1895 ; 4138,1924 4138,1942 ; 4138,1972 4138,1990 ; 4138,2020 4138,2035 ; 4138,2066 4138,2068 ; 4138,2111 4138,2128 ; 4138,2159 4138,2170 ; 4138,2211 4138,2228 ; 4138,2258 4138,2267 ; 4138,2302 4138,2332 ; 4138,2367 4138,2416 ; 4139,1826 4139,1867 ; 4139,1870 4139,1873 ; 4139,1877 4139,1881 ; 4139,1883 4139,1896 ; 4139,1924 4139,1942 ; 4139,1972 4139,1990 ; 4139,2021 4139,2036 ; 4139,2066 4139,2069 ; 4139,2111 4139,2128 ; 4139,2159 4139,2170 ; 4139,2211 4139,2228 ; 4139,2259 4139,2267 ; 4139,2302 4139,2333 ; 4139,2368 4139,2416 ; 4140,1826 4140,1867 ; 4140,1868 4140,1869 ; 4140,1870 4140,1873 ; 4140,1877 4140,1881 ; 4140,1883 4140,1897 ; 4140,1924 4140,1942 ; 4140,1973 4140,1990 ; 4140,2021 4140,2036 ; 4140,2066 4140,2070 ; 4140,2110 4140,2128 ; 4140,2159 4140,2170 ; 4140,2210 4140,2228 ; 4140,2259 4140,2267 ; 4140,2302 4140,2333 ; 4140,2368 4140,2416 ; 4141,1826 4141,1867 ; 4141,1868 4141,1869 ; 4141,1871 4141,1873 ; 4141,1874 4141,1875 ; 4141,1877 4141,1881 ; 4141,1883 4141,1899 ; 4141,1925 4141,1942 ; 4141,1973 4141,1990 ; 4141,2021 4141,2036 ; 4141,2067 4141,2071 ; 4141,2110 4141,2129 ; 4141,2159 4141,2171 ; 4141,2210 4141,2229 ; 4141,2259 4141,2267 ; 4141,2302 4141,2334 ; 4141,2369 4141,2416 ; 4142,1826 4142,1867 ; 4142,1868 4142,1870 ; 4142,1871 4142,1872 ; 4142,1874 4142,1875 ; 4142,1877 4142,1881 ; 4142,1883 4142,1900 ; 4142,1925 4142,1943 ; 4142,1973 4142,1991 ; 4142,2021 4142,2036 ; 4142,2067 4142,2073 ; 4142,2109 4142,2129 ; 4142,2160 4142,2171 ; 4142,2209 4142,2229 ; 4142,2259 4142,2267 ; 4142,2302 4142,2334 ; 4142,2369 4142,2416 ; 4143,1826 4143,1867 ; 4143,1868 4143,1870 ; 4143,1873 4143,1875 ; 4143,1877 4143,1881 ; 4143,1883 4143,1902 ; 4143,1925 4143,1943 ; 4143,1973 4143,1991 ; 4143,2022 4143,2037 ; 4143,2067 4143,2074 ; 4143,2108 4143,2129 ; 4143,2160 4143,2171 ; 4143,2207 4143,2229 ; 4143,2260 4143,2267 ; 4143,2302 4143,2334 ; 4143,2370 4143,2416 ; 4144,1826 4144,1867 ; 4144,1868 4144,1870 ; 4144,1873 4144,1875 ; 4144,1877 4144,1881 ; 4144,1883 4144,1904 ; 4144,1925 4144,1943 ; 4144,1974 4144,1991 ; 4144,2022 4144,2037 ; 4144,2067 4144,2076 ; 4144,2106 4144,2129 ; 4144,2160 4144,2171 ; 4144,2205 4144,2229 ; 4144,2260 4144,2267 ; 4144,2302 4144,2335 ; 4144,2370 4144,2416 ; 4145,1826 4145,1867 ; 4145,1868 4145,1871 ; 4145,1873 4145,1875 ; 4145,1877 4145,1881 ; 4145,1883 4145,1908 ; 4145,1926 4145,1943 ; 4145,1974 4145,1991 ; 4145,2022 4145,2037 ; 4145,2068 4145,2078 ; 4145,2104 4145,2130 ; 4145,2160 4145,2172 ; 4145,2202 4145,2230 ; 4145,2260 4145,2267 ; 4145,2302 4145,2335 ; 4145,2371 4145,2416 ; 4146,1826 4146,2081 ; 4146,2102 4146,2181 ; 4146,2193 4146,2416 ; 4147,1826 4147,2086 ; 4147,2097 4147,2416 ; 4148,1826 4148,2416 ; 4149,1826 4149,2416 ; 4150,1826 4150,2416 ; 4151,1826 4151,2416 ; 4152,1826 4152,2416 ; 4153,1826 4153,2416 ; 4154,1826 4154,2416 ; 4155,1826 4155,2416 ; 4156,1826 4156,2416 ; 4157,1826 4157,2416 ; 4158,1826 4158,2416 ; 4159,1826 4159,2416 ; 4160,1826 4160,2416 ; 4161,1826 4161,2416 ; 4162,1826 4162,2416 ; 4163,1826 4163,2416 ; 4164,1826 4164,2416 ; 4165,1826 4165,2416 ; 4166,1826 4166,2416 ; 4167,1826 4167,2416 ; 4168,1826 4168,2416 ; 4169,1826 4169,1867 ; 4169,1869 4169,1874 ; 4169,1877 4169,1878 ; 4169,1885 4169,2232 ; 4169,2236 4169,2323 ; 4169,2327 4169,2416 ; 4170,1826 4170,1867 ; 4170,1870 4170,1874 ; 4170,1877 4170,1881 ; 4170,1882 4170,1923 ; 4170,1927 4170,2028 ; 4170,2032 4170,2129 ; 4170,2133 4170,2232 ; 4170,2236 4170,2306 ; 4170,2310 4170,2323 ; 4170,2327 4170,2416 ; 4171,1826 4171,1867 ; 4171,1870 4171,1873 ; 4171,1877 4171,1881 ; 4171,1882 4171,1923 ; 4171,1927 4171,1964 ; 4171,1976 4171,2028 ; 4171,2032 4171,2075 ; 4171,2085 4171,2129 ; 4171,2133 4171,2232 ; 4171,2236 4171,2241 ; 4171,2253 4171,2306 ; 4171,2310 4171,2323 ; 4171,2327 4171,2350 ; 4171,2357 4171,2366 ; 4171,2372 4171,2416 ; 4172,1826 4172,1867 ; 4172,1868 4172,1869 ; 4172,1871 4172,1873 ; 4172,1877 4172,1881 ; 4172,1882 4172,1923 ; 4172,1927 4172,1964 ; 4172,1976 4172,2028 ; 4172,2032 4172,2072 ; 4172,2085 4172,2129 ; 4172,2133 4172,2190 ; 4172,2192 4172,2232 ; 4172,2236 4172,2241 ; 4172,2253 4172,2306 ; 4172,2310 4172,2323 ; 4172,2327 4172,2350 ; 4172,2357 4172,2365 ; 4172,2372 4172,2416 ; 4173,1826 4173,1867 ; 4173,1868 4173,1869 ; 4173,1871 4173,1872 ; 4173,1874 4173,1875 ; 4173,1877 4173,1881 ; 4173,1882 4173,1964 ; 4173,1976 4173,2071 ; 4173,2085 4173,2190 ; 4173,2194 4173,2232 ; 4173,2236 4173,2241 ; 4173,2253 4173,2323 ; 4173,2327 4173,2350 ; 4173,2357 4173,2365 ; 4173,2372 4173,2416 ; 4174,1826 4174,1867 ; 4174,1868 4174,1870 ; 4174,1874 4174,1875 ; 4174,1877 4174,1881 ; 4174,1882 4174,1971 ; 4174,1976 4174,2070 ; 4174,2077 4174,2081 ; 4174,2085 4174,2190 ; 4174,2194 4174,2232 ; 4174,2236 4174,2249 ; 4174,2253 4174,2323 ; 4174,2327 4174,2350 ; 4174,2358 4174,2365 ; 4174,2372 4174,2416 ; 4175,1826 4175,1867 ; 4175,1868 4175,1870 ; 4175,1873 4175,1875 ; 4175,1877 4175,1881 ; 4175,1882 4175,1971 ; 4175,1976 4175,2070 ; 4175,2075 4175,2081 ; 4175,2085 4175,2190 ; 4175,2194 4175,2232 ; 4175,2236 4175,2249 ; 4175,2253 4175,2323 ; 4175,2327 4175,2350 ; 4175,2358 4175,2364 ; 4175,2372 4175,2416 ; 4176,1826 4176,1867 ; 4176,1868 4176,1871 ; 4176,1873 4176,1875 ; 4176,1877 4176,1881 ; 4176,1882 4176,1892 ; 4176,1895 4176,1897 ; 4176,1900 4176,1908 ; 4176,1915 4176,1923 ; 4176,1927 4176,1932 ; 4176,1940 4176,1949 ; 4176,1957 4176,1971 ; 4176,1976 4176,1993 ; 4176,1999 4176,2000 ; 4176,2004 4176,2009 ; 4176,2013 4176,2015 ; 4176,2021 4176,2028 ; 4176,2032 4176,2037 ; 4176,2045 4176,2054 ; 4176,2061 4176,2069 ; 4176,2074 4176,2081 ; 4176,2085 4176,2100 ; 4176,2108 4176,2113 ; 4176,2121 4176,2129 ; 4176,2133 4176,2140 ; 4176,2146 4176,2148 ; 4176,2152 4176,2160 ; 4176,2167 4176,2174 ; 4176,2177 4176,2179 ; 4176,2182 4176,2187 ; 4176,2197 4176,2199 ; 4176,2206 4176,2217 ; 4176,2224 4176,2232 ; 4176,2236 4176,2249 ; 4176,2253 4176,2268 ; 4176,2272 4176,2273 ; 4176,2279 4176,2289 ; 4176,2295 4176,2297 ; 4176,2300 4176,2306 ; 4176,2310 4176,2314 ; 4176,2319 4176,2323 ; 4176,2327 4176,2334 ; 4176,2343 4176,2350 ; 4176,2358 4176,2364 ; 4176,2372 4176,2416 ; 4177,1826 4177,1892 ; 4177,1896 4177,1897 ; 4177,1900 4177,1907 ; 4177,1916 4177,1923 ; 4177,1927 4177,1932 ; 4177,1941 4177,1948 ; 4177,1958 4177,1971 ; 4177,1976 4177,1992 ; 4177,2004 4177,2009 ; 4177,2022 4177,2028 ; 4177,2032 4177,2037 ; 4177,2046 4177,2053 ; 4177,2063 4177,2069 ; 4177,2074 4177,2081 ; 4177,2085 4177,2100 ; 4177,2109 4177,2114 ; 4177,2122 4177,2129 ; 4177,2133 4177,2139 ; 4177,2152 4177,2158 ; 4177,2169 4177,2174 ; 4177,2178 4177,2179 ; 4177,2182 4177,2187 ; 4177,2197 4177,2199 ; 4177,2208 4177,2216 ; 4177,2225 4177,2232 ; 4177,2236 4177,2249 ; 4177,2253 4177,2268 ; 4177,2280 4177,2288 ; 4177,2300 4177,2306 ; 4177,2310 4177,2315 ; 4177,2320 4177,2323 ; 4177,2327 4177,2333 ; 4177,2344 4177,2350 ; 4177,2354 4177,2355 ; 4177,2359 4177,2364 ; 4177,2372 4177,2416 ; 4178,1826 4178,1892 ; 4178,1900 4178,1906 ; 4178,1917 4178,1923 ; 4178,1927 4178,1932 ; 4178,1942 4178,1947 ; 4178,1958 4178,1971 ; 4178,1976 4178,1991 ; 4178,2004 4178,2009 ; 4178,2023 4178,2028 ; 4178,2032 4178,2038 ; 4178,2047 4178,2052 ; 4178,2063 4178,2069 ; 4178,2073 4178,2081 ; 4178,2085 4178,2100 ; 4178,2110 4178,2114 ; 4178,2123 4178,2129 ; 4178,2133 4178,2139 ; 4178,2152 4178,2158 ; 4178,2170 4178,2174 ; 4178,2182 4178,2187 ; 4178,2197 4178,2199 ; 4178,2209 4178,2215 ; 4178,2226 4178,2232 ; 4178,2236 4178,2249 ; 4178,2253 4178,2268 ; 4178,2281 4178,2287 ; 4178,2300 4178,2306 ; 4178,2310 4178,2316 ; 4178,2320 4178,2323 ; 4178,2327 4178,2333 ; 4178,2344 4178,2350 ; 4178,2354 4178,2355 ; 4178,2359 4178,2363 ; 4178,2367 4178,2368 ; 4178,2372 4178,2416 ; 4179,1826 4179,1892 ; 4179,1900 4179,1906 ; 4179,1909 4179,1914 ; 4179,1918 4179,1923 ; 4179,1927 4179,1938 ; 4179,1942 4179,1947 ; 4179,1951 4179,1956 ; 4179,1958 4179,1964 ; 4179,1976 4179,1991 ; 4179,1995 4179,1999 ; 4179,2004 4179,2009 ; 4179,2015 4179,2018 ; 4179,2023 4179,2028 ; 4179,2032 4179,2043 ; 4179,2047 4179,2052 ; 4179,2055 4179,2060 ; 4179,2064 4179,2068 ; 4179,2073 4179,2081 ; 4179,2085 4179,2106 ; 4179,2110 4179,2119 ; 4179,2124 4179,2129 ; 4179,2133 4179,2138 ; 4179,2143 4179,2146 ; 4179,2152 4179,2157 ; 4179,2162 4179,2166 ; 4179,2171 4179,2174 ; 4179,2182 4179,2190 ; 4179,2194 4179,2204 ; 4179,2209 4179,2214 ; 4179,2218 4179,2223 ; 4179,2227 4179,2232 ; 4179,2236 4179,2242 ; 4179,2253 4179,2268 ; 4179,2273 4179,2277 ; 4179,2282 4179,2287 ; 4179,2291 4179,2295 ; 4179,2300 4179,2306 ; 4179,2310 4179,2317 ; 4179,2321 4179,2323 ; 4179,2327 4179,2332 ; 4179,2336 4179,2342 ; 4179,2344 4179,2350 ; 4179,2354 4179,2355 ; 4179,2359 4179,2363 ; 4179,2367 4179,2368 ; 4179,2372 4179,2416 ; 4180,1826 4180,1895 ; 4180,1900 4180,1905 ; 4180,1909 4180,1915 ; 4180,1918 4180,1923 ; 4180,1927 4180,1938 ; 4180,1942 4180,1946 ; 4180,1950 4180,1964 ; 4180,1976 4180,1991 ; 4180,1995 4180,1999 ; 4180,2004 4180,2009 ; 4180,2014 4180,2019 ; 4180,2024 4180,2028 ; 4180,2032 4180,2043 ; 4180,2047 4180,2051 ; 4180,2055 4180,2061 ; 4180,2064 4180,2068 ; 4180,2073 4180,2081 ; 4180,2085 4180,2106 ; 4180,2110 4180,2119 ; 4180,2124 4180,2129 ; 4180,2133 4180,2138 ; 4180,2142 4180,2147 ; 4180,2152 4180,2156 ; 4180,2161 4180,2167 ; 4180,2171 4180,2178 ; 4180,2182 4180,2190 ; 4180,2194 4180,2205 ; 4180,2210 4180,2214 ; 4180,2218 4180,2223 ; 4180,2227 4180,2232 ; 4180,2236 4180,2242 ; 4180,2253 4180,2268 ; 4180,2272 4180,2278 ; 4180,2282 4180,2287 ; 4180,2291 4180,2296 ; 4180,2300 4180,2306 ; 4180,2310 4180,2317 ; 4180,2322 4180,2323 ; 4180,2327 4180,2332 ; 4180,2336 4180,2350 ; 4180,2354 4180,2356 ; 4180,2359 4180,2363 ; 4180,2366 4180,2368 ; 4180,2372 4180,2416 ; 4181,1826 4181,1896 ; 4181,1900 4181,1905 ; 4181,1909 4181,1915 ; 4181,1919 4181,1923 ; 4181,1927 4181,1937 ; 4181,1942 4181,1946 ; 4181,1950 4181,1964 ; 4181,1976 4181,1991 ; 4181,1995 4181,2000 ; 4181,2004 4181,2009 ; 4181,2014 4181,2020 ; 4181,2024 4181,2028 ; 4181,2032 4181,2042 ; 4181,2047 4181,2051 ; 4181,2055 4181,2061 ; 4181,2065 4181,2068 ; 4181,2073 4181,2081 ; 4181,2085 4181,2105 ; 4181,2110 4181,2120 ; 4181,2124 4181,2129 ; 4181,2133 4181,2138 ; 4181,2142 4181,2147 ; 4181,2152 4181,2156 ; 4181,2160 4181,2167 ; 4181,2171 4181,2178 ; 4181,2182 4181,2190 ; 4181,2194 4181,2206 ; 4181,2210 4181,2214 ; 4181,2217 4181,2224 ; 4181,2227 4181,2232 ; 4181,2236 4181,2242 ; 4181,2253 4181,2268 ; 4181,2272 4181,2278 ; 4181,2282 4181,2287 ; 4181,2291 4181,2296 ; 4181,2300 4181,2306 ; 4181,2310 4181,2318 ; 4181,2327 4181,2332 ; 4181,2336 4181,2350 ; 4181,2354 4181,2356 ; 4181,2360 4181,2362 ; 4181,2366 4181,2368 ; 4181,2372 4181,2416 ; 4182,1826 4182,1896 ; 4182,1900 4182,1905 ; 4182,1919 4182,1923 ; 4182,1927 4182,1934 ; 4182,1942 4182,1946 ; 4182,1957 4182,1971 ; 4182,1976 4182,1991 ; 4182,1994 4182,2000 ; 4182,2004 4182,2009 ; 4182,2013 4182,2020 ; 4182,2024 4182,2028 ; 4182,2032 4182,2039 ; 4182,2047 4182,2051 ; 4182,2065 4182,2068 ; 4182,2073 4182,2081 ; 4182,2085 4182,2102 ; 4182,2110 4182,2120 ; 4182,2124 4182,2129 ; 4182,2133 4182,2138 ; 4182,2142 4182,2148 ; 4182,2152 4182,2156 ; 4182,2160 4182,2167 ; 4182,2171 4182,2178 ; 4182,2182 4182,2190 ; 4182,2194 4182,2206 ; 4182,2210 4182,2214 ; 4182,2227 4182,2232 ; 4182,2236 4182,2249 ; 4182,2253 4182,2268 ; 4182,2272 4182,2278 ; 4182,2282 4182,2287 ; 4182,2291 4182,2296 ; 4182,2300 4182,2306 ; 4182,2310 4182,2319 ; 4182,2327 4182,2332 ; 4182,2343 4182,2350 ; 4182,2354 4182,2356 ; 4182,2360 4182,2362 ; 4182,2366 4182,2368 ; 4182,2372 4182,2416 ; 4183,1826 4183,1896 ; 4183,1900 4183,1905 ; 4183,1919 4183,1923 ; 4183,1927 4183,1932 ; 4183,1941 4183,1946 ; 4183,1958 4183,1971 ; 4183,1976 4183,1991 ; 4183,1994 4183,2000 ; 4183,2004 4183,2009 ; 4183,2013 4183,2020 ; 4183,2024 4183,2028 ; 4183,2032 4183,2038 ; 4183,2046 4183,2051 ; 4183,2065 4183,2069 ; 4183,2073 4183,2081 ; 4183,2085 4183,2100 ; 4183,2109 4183,2120 ; 4183,2124 4183,2129 ; 4183,2133 4183,2138 ; 4183,2142 4183,2148 ; 4183,2152 4183,2156 ; 4183,2160 4183,2167 ; 4183,2171 4183,2178 ; 4183,2182 4183,2190 ; 4183,2194 4183,2206 ; 4183,2210 4183,2214 ; 4183,2227 4183,2232 ; 4183,2236 4183,2249 ; 4183,2253 4183,2268 ; 4183,2272 4183,2278 ; 4183,2282 4183,2287 ; 4183,2291 4183,2296 ; 4183,2300 4183,2306 ; 4183,2310 4183,2319 ; 4183,2327 4183,2332 ; 4183,2344 4183,2350 ; 4183,2354 4183,2357 ; 4183,2360 4183,2362 ; 4183,2366 4183,2368 ; 4183,2372 4183,2416 ; 4184,1826 4184,1896 ; 4184,1900 4184,1905 ; 4184,1919 4184,1923 ; 4184,1927 4184,1932 ; 4184,1938 4184,1946 ; 4184,1950 4184,1954 ; 4184,1959 4184,1971 ; 4184,1976 4184,1991 ; 4184,1994 4184,2000 ; 4184,2004 4184,2009 ; 4184,2013 4184,2020 ; 4184,2024 4184,2028 ; 4184,2032 4184,2037 ; 4184,2044 4184,2051 ; 4184,2065 4184,2069 ; 4184,2074 4184,2081 ; 4184,2085 4184,2100 ; 4184,2107 4184,2120 ; 4184,2124 4184,2129 ; 4184,2133 4184,2138 ; 4184,2142 4184,2148 ; 4184,2152 4184,2156 ; 4184,2160 4184,2167 ; 4184,2171 4184,2179 ; 4184,2182 4184,2190 ; 4184,2194 4184,2206 ; 4184,2210 4184,2214 ; 4184,2227 4184,2232 ; 4184,2236 4184,2249 ; 4184,2253 4184,2268 ; 4184,2272 4184,2278 ; 4184,2282 4184,2287 ; 4184,2291 4184,2296 ; 4184,2300 4184,2306 ; 4184,2310 4184,2318 ; 4184,2327 4184,2332 ; 4184,2336 4184,2340 ; 4184,2345 4184,2350 ; 4184,2354 4184,2357 ; 4184,2361 4184,2362 ; 4184,2365 4184,2368 ; 4184,2372 4184,2416 ; 4185,1826 4185,1896 ; 4185,1900 4185,1915 ; 4185,1919 4185,1923 ; 4185,1927 4185,1932 ; 4185,1936 4185,1946 ; 4185,1950 4185,1955 ; 4185,1959 4185,1971 ; 4185,1976 4185,1991 ; 4185,1994 4185,2000 ; 4185,2004 4185,2009 ; 4185,2014 4185,2019 ; 4185,2024 4185,2028 ; 4185,2032 4185,2037 ; 4185,2041 4185,2061 ; 4185,2065 4185,2069 ; 4185,2074 4185,2081 ; 4185,2085 4185,2100 ; 4185,2104 4185,2120 ; 4185,2124 4185,2129 ; 4185,2133 4185,2138 ; 4185,2142 4185,2148 ; 4185,2152 4185,2156 ; 4185,2160 4185,2167 ; 4185,2171 4185,2179 ; 4185,2182 4185,2190 ; 4185,2194 4185,2206 ; 4185,2210 4185,2224 ; 4185,2227 4185,2232 ; 4185,2236 4185,2249 ; 4185,2253 4185,2268 ; 4185,2272 4185,2278 ; 4185,2282 4185,2287 ; 4185,2291 4185,2296 ; 4185,2300 4185,2306 ; 4185,2310 4185,2317 ; 4185,2322 4185,2323 ; 4185,2327 4185,2332 ; 4185,2336 4185,2341 ; 4185,2345 4185,2350 ; 4185,2354 4185,2357 ; 4185,2365 4185,2368 ; 4185,2372 4185,2416 ; 4186,1826 4186,1896 ; 4186,1900 4186,1914 ; 4186,1918 4186,1923 ; 4186,1927 4186,1931 ; 4186,1936 4186,1946 ; 4186,1950 4186,1956 ; 4186,1959 4186,1971 ; 4186,1976 4186,1991 ; 4186,1994 4186,2000 ; 4186,2004 4186,2009 ; 4186,2014 4186,2019 ; 4186,2024 4186,2028 ; 4186,2032 4186,2037 ; 4186,2041 4186,2060 ; 4186,2064 4186,2070 ; 4186,2076 4186,2081 ; 4186,2085 4186,2100 ; 4186,2104 4186,2119 ; 4186,2124 4186,2129 ; 4186,2133 4186,2138 ; 4186,2142 4186,2148 ; 4186,2152 4186,2156 ; 4186,2161 4186,2167 ; 4186,2171 4186,2179 ; 4186,2182 4186,2190 ; 4186,2194 4186,2205 ; 4186,2210 4186,2223 ; 4186,2227 4186,2232 ; 4186,2236 4186,2249 ; 4186,2253 4186,2268 ; 4186,2273 4186,2277 ; 4186,2282 4186,2287 ; 4186,2291 4186,2296 ; 4186,2300 4186,2306 ; 4186,2310 4186,2316 ; 4186,2321 4186,2323 ; 4186,2327 4186,2332 ; 4186,2336 4186,2341 ; 4186,2345 4186,2350 ; 4186,2354 4186,2358 ; 4186,2365 4186,2368 ; 4186,2372 4186,2416 ; 4187,1826 4187,1896 ; 4187,1900 4187,1906 ; 4187,1907 4187,1913 ; 4187,1918 4187,1923 ; 4187,1927 4187,1932 ; 4187,1936 4187,1946 ; 4187,1951 4187,1955 ; 4187,1959 4187,1971 ; 4187,1976 4187,1991 ; 4187,1994 4187,2000 ; 4187,2004 4187,2009 ; 4187,2015 4187,2018 ; 4187,2023 4187,2028 ; 4187,2032 4187,2037 ; 4187,2041 4187,2052 ; 4187,2053 4187,2059 ; 4187,2064 4187,2070 ; 4187,2078 4187,2081 ; 4187,2085 4187,2100 ; 4187,2104 4187,2118 ; 4187,2124 4187,2129 ; 4187,2133 4187,2138 ; 4187,2142 4187,2148 ; 4187,2152 4187,2157 ; 4187,2162 4187,2166 ; 4187,2171 4187,2179 ; 4187,2182 4187,2189 ; 4187,2194 4187,2204 ; 4187,2209 4187,2215 ; 4187,2216 4187,2222 ; 4187,2227 4187,2232 ; 4187,2236 4187,2249 ; 4187,2253 4187,2268 ; 4187,2274 4187,2276 ; 4187,2282 4187,2287 ; 4187,2291 4187,2296 ; 4187,2300 4187,2306 ; 4187,2310 4187,2316 ; 4187,2320 4187,2323 ; 4187,2327 4187,2332 ; 4187,2337 4187,2341 ; 4187,2345 4187,2350 ; 4187,2354 4187,2358 ; 4187,2364 4187,2368 ; 4187,2372 4187,2416 ; 4188,1826 4188,1896 ; 4188,1900 4188,1906 ; 4188,1917 4188,1923 ; 4188,1927 4188,1932 ; 4188,1942 4188,1946 ; 4188,1959 4188,1964 ; 4188,1976 4188,1991 ; 4188,1994 4188,2000 ; 4188,2004 4188,2009 ; 4188,2023 4188,2028 ; 4188,2032 4188,2037 ; 4188,2047 4188,2052 ; 4188,2063 4188,2071 ; 4188,2085 4188,2100 ; 4188,2110 4188,2113 ; 4188,2123 4188,2129 ; 4188,2133 4188,2138 ; 4188,2142 4188,2148 ; 4188,2152 4188,2158 ; 4188,2170 4188,2179 ; 4188,2182 4188,2186 ; 4188,2194 4188,2199 ; 4188,2209 4188,2215 ; 4188,2226 4188,2232 ; 4188,2236 4188,2241 ; 4188,2253 4188,2268 ; 4188,2281 4188,2287 ; 4188,2291 4188,2296 ; 4188,2300 4188,2306 ; 4188,2310 4188,2315 ; 4188,2320 4188,2323 ; 4188,2327 4188,2332 ; 4188,2345 4188,2350 ; 4188,2354 4188,2358 ; 4188,2364 4188,2368 ; 4188,2372 4188,2416 ; 4189,1826 4189,1896 ; 4189,1900 4189,1906 ; 4189,1916 4189,1923 ; 4189,1927 4189,1933 ; 4189,1942 4189,1946 ; 4189,1959 4189,1964 ; 4189,1976 4189,1991 ; 4189,1994 4189,2000 ; 4189,2004 4189,2009 ; 4189,2013 4189,2014 ; 4189,2022 4189,2028 ; 4189,2032 4189,2038 ; 4189,2047 4189,2052 ; 4189,2062 4189,2073 ; 4189,2085 4189,2101 ; 4189,2110 4189,2113 ; 4189,2122 4189,2129 ; 4189,2133 4189,2138 ; 4189,2142 4189,2148 ; 4189,2152 4189,2158 ; 4189,2169 4189,2179 ; 4189,2182 4189,2186 ; 4189,2193 4189,2199 ; 4189,2208 4189,2215 ; 4189,2225 4189,2232 ; 4189,2236 4189,2241 ; 4189,2253 4189,2268 ; 4189,2280 4189,2287 ; 4189,2291 4189,2296 ; 4189,2300 4189,2306 ; 4189,2310 4189,2314 ; 4189,2319 4189,2323 ; 4189,2327 4189,2332 ; 4189,2344 4189,2350 ; 4189,2354 4189,2359 ; 4189,2364 4189,2368 ; 4189,2372 4189,2416 ; 4190,1826 4190,1896 ; 4190,1900 4190,1907 ; 4190,1915 4190,1923 ; 4190,1927 4190,1934 ; 4190,1942 4190,1946 ; 4190,1950 4190,1951 ; 4190,1957 4190,1964 ; 4190,1976 4190,1991 ; 4190,1994 4190,2000 ; 4190,2004 4190,2009 ; 4190,2013 4190,2016 ; 4190,2020 4190,2028 ; 4190,2032 4190,2039 ; 4190,2047 4190,2053 ; 4190,2061 4190,2075 ; 4190,2085 4190,2102 ; 4190,2110 4190,2113 ; 4190,2120 4190,2129 ; 4190,2133 4190,2138 ; 4190,2142 4190,2148 ; 4190,2152 4190,2160 ; 4190,2167 4190,2179 ; 4190,2182 4190,2186 ; 4190,2192 4190,2199 ; 4190,2206 4190,2215 ; 4190,2223 4190,2232 ; 4190,2236 4190,2241 ; 4190,2253 4190,2268 ; 4190,2272 4190,2274 ; 4190,2279 4190,2287 ; 4190,2291 4190,2296 ; 4190,2300 4190,2306 ; 4190,2310 4190,2313 ; 4190,2318 4190,2323 ; 4190,2327 4190,2332 ; 4190,2335 4190,2337 ; 4190,2343 4190,2350 ; 4190,2354 4190,2359 ; 4190,2363 4190,2368 ; 4190,2372 4190,2416 ; 4191,1826 4191,2010 ; 4191,2014 4191,2268 ; 4191,2272 4191,2416 ; 4192,1826 4192,2010 ; 4192,2014 4192,2268 ; 4192,2273 4192,2416 ; 4193,1826 4193,2010 ; 4193,2015 4193,2020 ; 4193,2022 4193,2269 ; 4193,2274 4193,2279 ; 4193,2281 4193,2416 ; 4194,1826 4194,2011 ; 4194,2022 4194,2269 ; 4194,2281 4194,2416 ; 4195,1826 4195,2012 ; 4195,2022 4195,2270 ; 4195,2281 4195,2416 ; 4196,1826 4196,2013 ; 4196,2021 4196,2271 ; 4196,2280 4196,2416 ; 4197,1826 4197,2416 ; 4198,1826 4198,2416 ; 4199,1826 4199,2416 ; 4200,1826 4200,2416 ; 4201,1826 4201,2416 ; 4202,1826 4202,2416 ; 4203,1826 4203,2416 ; 4204,1826 4204,2416 ; 4205,1826 4205,2416 ; 4206,1826 4206,2416 ; 4207,1826 4207,2416 ; 4208,1826 4208,2416 ; 4209,1826 4209,2416 ; 4210,1826 4210,2416 ; 4211,1827 4211,2416 ; 4212,1827 4212,2416 ; 4213,1827 4213,2416 ; 4214,1828 4214,2416 ; 4215,1828 4215,2416 ; 4216,1828 4216,2416 ; 4217,1829 4217,2416 ; 4218,1829 4218,2416 ; 4219,1830 4219,2416 ; 4220,1830 4220,2416 ; 4221,1831 4221,2416 ; 4222,1832 4222,2416 ; 4223,1832 4223,2416 ; 4224,1833 4224,2416 ; 4225,1834 4225,2416 ; 4226,1835 4226,2416 ; 4227,1836 4227,2416 ; 4228,1837 4228,2416 ; 4229,1838 4229,2416 ; 4230,1839 4230,2416 ; 4231,1840 4231,2416 ; 4232,1841 4232,2416 ; 4233,1842 4233,2416 ; 4234,1844 4234,2416 ; 4235,1845 4235,2416 ; 4236,1847 4236,2416 ; 4237,1849 4237,2416 ; 4238,1851 4238,2416

## Polygon pours and split planes (outlines as drawn)
GND on Bottom Layer "GND_L02_P016" (hatched 45Degree grid 30 track 8, pour order 16): 2335,4195 4565,4195 4565,1675 2335,1675
GND on Bottom Layer "GND_L02_P012" (hatched 45Degree grid 30 track 8, pour order 12): 2335,4195
GND on Bottom Layer "GND_L02_P006" (hatched 45Degree grid 30 track 8, pour order 6): 2325,4200
no net on Bottom Layer "NONET_L02_P000" (hatched 45Degree grid 30 track 8, pour order 0): 2335,4130

## Keep-outs
Keep-Out Layer:
  lines w10: 4565,1675 4565,4195 2335,4195 2335,1675 4565,1675 ; 4565,1675 4565,1675

## Silkscreen, mask and mechanical layers (free items; w line width, h text height)
Top Overlay:
  lines w10: 3060,3825 3210,3825 ; 3665,3825 3815,3825 ; 4135,3005 4245,3005 ; 3060,1910 3060,3940 3210,3940 3210,1910 3060,1910 ; 3665,1910 3665,3940 3730,3940 3815,3940 3815,1910 3665,1910
  text "RX" at 4010,2820 h50
  text "TX" at 4010,2720 h50
  text "GND" at 3970,2620 h50
  text "EMBEDDED SYSTEM DESIGN BOARD" at 3976,1725 h50 r90

## Dimensions
4845,1675 to 4930,4195 on Top Overlay
2335,1550 to 4570,1560 on Top Overlay